# EAGLE board QwiicMicocontroller-Panel (EAGLE 9.0.0), part 1 of 13
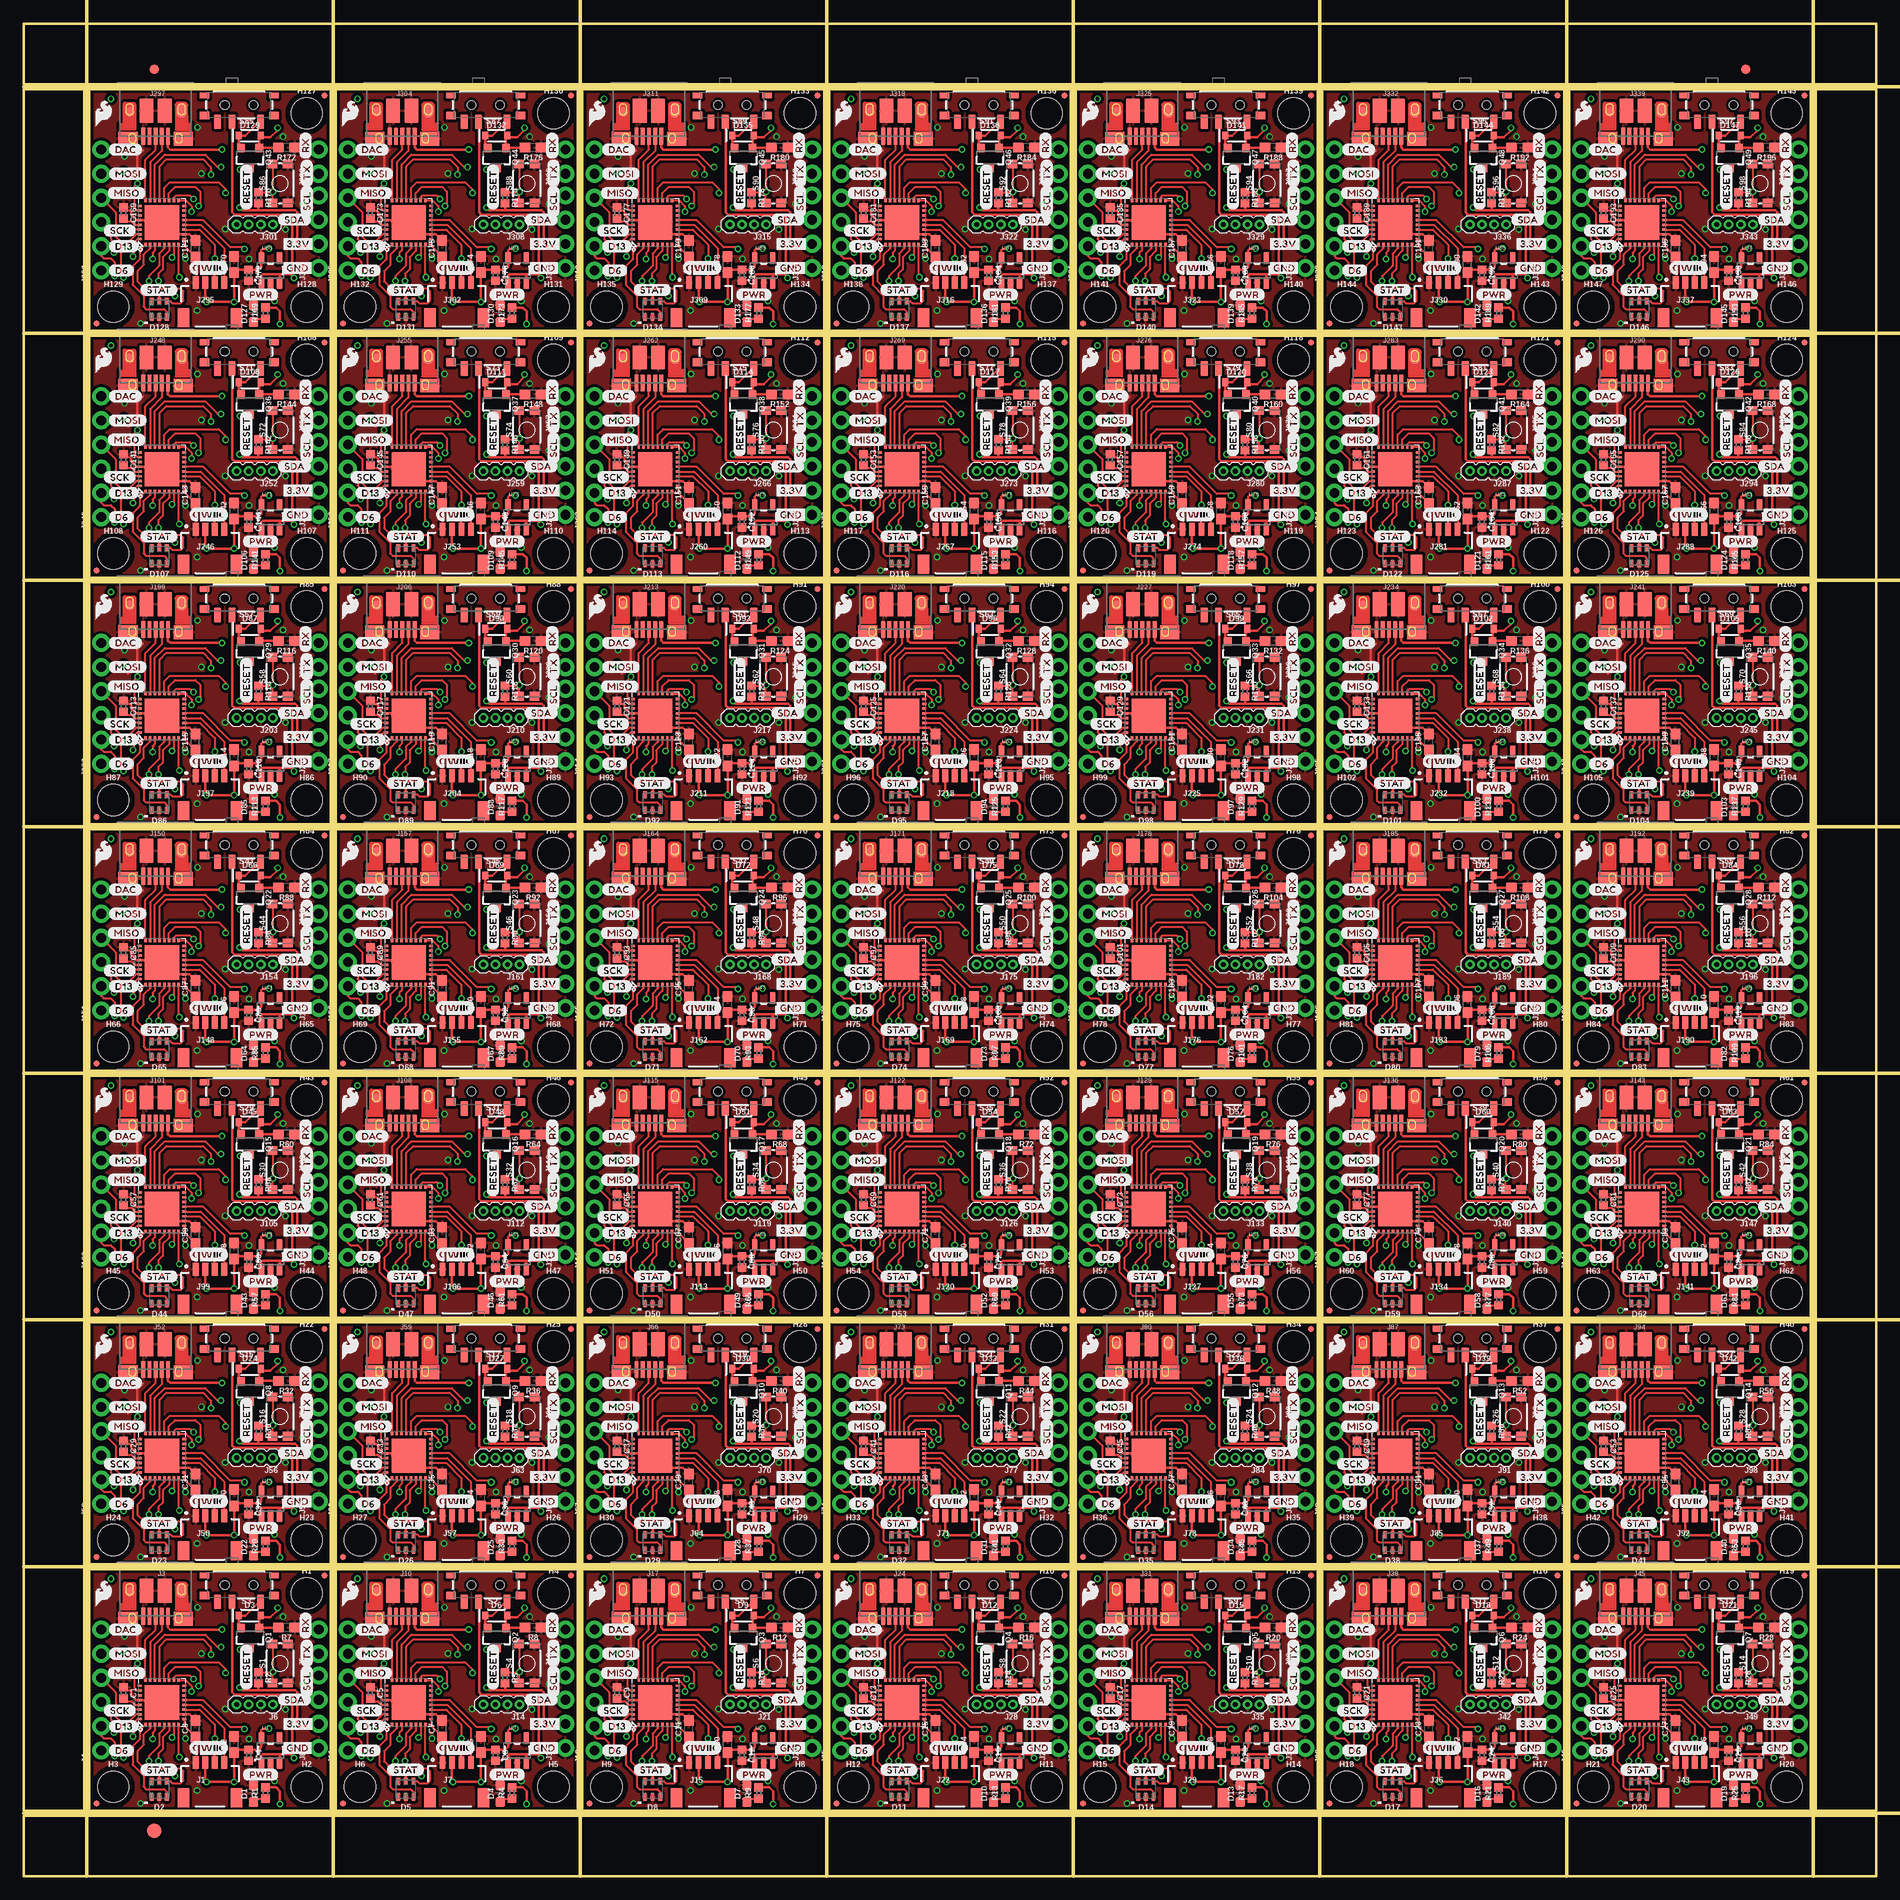
[diagram p0: board, top side]
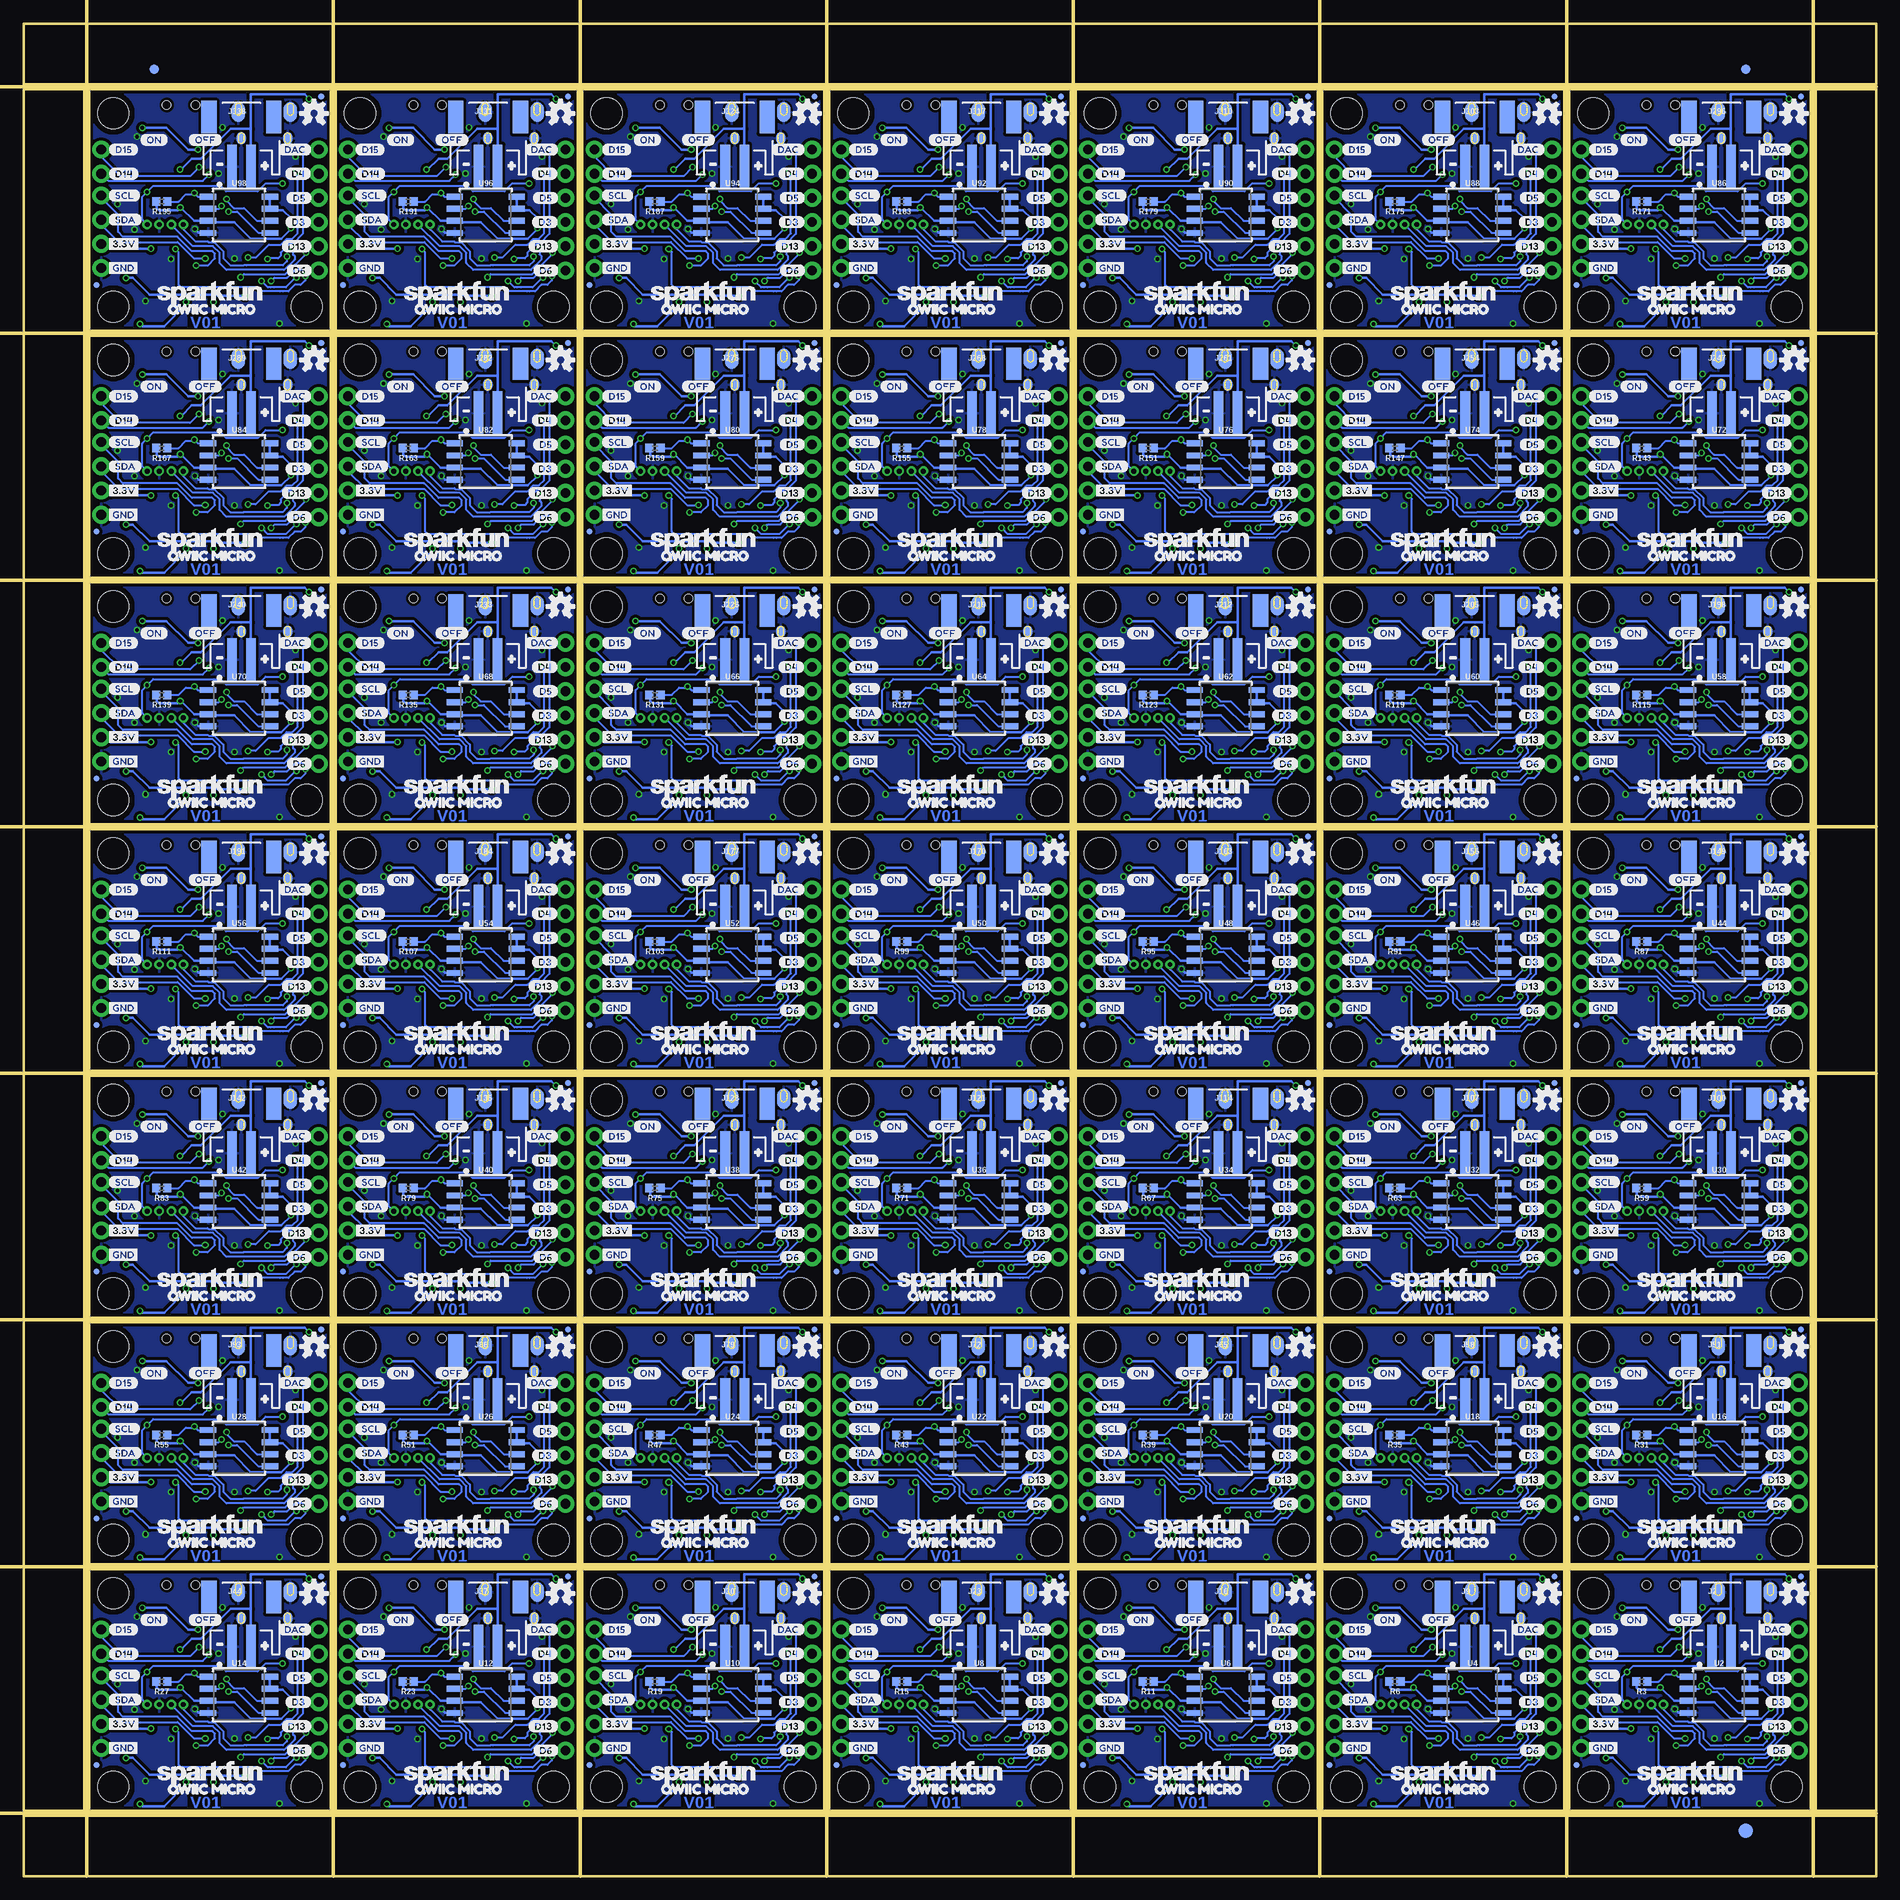
[diagram p1: board, bottom side, seen from below]

Size 194.56 x 194.56 mm. Coordinates in mm from the lower left corner, seen from the top.
Outline: 212 segments
Copper layers (1*16): Top 0.035mm / dielectric 1.5mm / Bottom 0.035mm
Design rules "SparkFun-2-layer-PCBWay-LIMIT": minimum track width 6mil, minimum drill 0.3mm, track to track 6mil, track to pad 6mil, pad to pad 6mil, via to via 6mil, smd to smd 6mil, copper to edge 6mil, drill to drill 6mil, minimum pad ring 6mil, minimum via ring 6mil, stop-mask expansion 4mil, vias tented up to drill 25mil, thermal gap 10mil
Milling: 16 lines

## Footprints (pad centres in the part's own frame; a part is rotated, then mirrored left to right if it is on the bottom)
0402 = smd 0.85 x 0.9: 1 -0.58,0; 2 0.58,0
0603 = smd 1.1 x 1: 1 -0.85,0; 2 0.85,0
LED-0603 = smd 1 x 1: A -0.877,0; C 0.877,0
APA102-2020 = smd 0.4 x 0.7: CKI -0.8,-0.85; CKO 0.8,-0.85; GND 0,0.85; SDI -0.8,0.85; SDO 0.8,0.85; VDD 0,-0.85
SOD-323 = smd 0.63 x 0.83: A 1.15,0; C -1.15,0
FIDUCIAL-1X2 = smd 1 x 1: 1 0,0
FIDUCIAL-1.5X3 = smd 1.5 x 1.5: 1 0,0
FIDUCIAL-MICRO = smd 0.635 x 0.635: 1 0,0
STAND-OFF = hole 3.302: 0,0
JST04_1MM_RA = smd 0.6 x 1.35: 1 -1.5,0; 2 -0.5,0; 3 0.5,0; 4 1.5,0 | smd 1.2 x 2: NC1 2.8,-3.675; NC2 -2.8,-3.675
JST-2-SMD = smd 1 x 4.6: 1 -1,-3.7; 2 1,-3.7 | smd 1.6 x 3.4: NC1 -3.4,1.5; NC2 3.4,1.5
USB-MICROB-PTH-MILL = smd 0.4 x 1.75: D+ 0,0; D- -0.65,0; GND 1.3,0; ID 0.65,0; VBUS -1.3,0 | smd 2 x 1.46: SHIELD -2.9,0.275; SHIELD2 2.9,0.275 | smd 1.425 x 2.5: SHIELD3 -0.963,-2.675; SHIELD4 0.963,-2.675 | smd 1.4 x 2.1 bottom: SHIELD5 -2.731,-2.531; SHIELD7 2.729,-2.531 | smd 1 x 1: SHIELD6 2.7,-2.575 | smd 1.1 x 1.5: SHIELD8 -2.731,-2.731 | smd 1 x 1.3 bottom: SHIELD9 -2.43,0.195; SHIELD10 2.43,0.195
1X06_NO_SILK = drill 1.016 pad 1.88: 1 0,0; 2 2.54,0; 3 5.08,0; 4 7.62,0; 5 10.16,0; 6 12.7,0
1X02_NO_SILK = drill 1.016 pad 1.88: 1 0,0; 2 2.54,0
1X04_1.27MM = drill 0.508 pad 1: 1 0,0; 2 1.27,0; 3 2.54,0; 4 3.81,0
1X04_NO_SILK = drill 1.016 pad 1.88: 1 0,0; 2 2.54,0; 3 5.08,0; 4 7.62,0
SOT23-3 = smd 0.8 x 0.9: 1 -0.95,-1; 2 0.95,-1; 3 0,1.1
TACTILE_SWITCH_SMD_4.6X2.8MM = smd 0.9 x 1: 1 -2.05,-0.8; 2 2.05,-0.8; 3 2.05,0.8; 4 -2.05,0.8
SWITCH_SPST_SMD_A = smd 0.7 x 1.5: 1 -2.25,-1.75; 2 -0.75,-1.75; 3 2.25,-1.75 | smd 1 x 0.6: GND1 -3.65,1; GND3 3.65,1 | smd 1 x 0.8: GND2 -3.65,-1.1; GND4 3.65,-1.1 | hole 0.9: -1.5,0; 1.5,0
QFN32 = smd 0.25 x 0.4: GND 2.75,4.85; GNDANA 1.25,0.15; NRESET 3.75,4.85; PA08 1.75,0.15; PA09 2.25,0.15; PA10 2.75,0.15; PA11 3.25,0.15; PA14 3.75,0.15; PA15 4.25,0.15; PA27 4.25,4.85; PA28 3.25,4.85; PA30 1.25,4.85; PA31 0.75,4.85; VDDANA 0.75,0.15; VDDCORE 2.25,4.85; VDDIN 1.75,4.85 | smd 0.4 x 0.25: PA00 0.15,4.25; PA01 0.15,3.75; PA02 0.15,3.25; PA03 0.15,2.75; PA04 0.15,2.25; PA05 0.15,1.75; PA06 0.15,1.25; PA07 0.15,0.75; PA16 4.85,0.75; PA17 4.85,1.25; PA18 4.85,1.75; PA19 4.85,2.25; PA22 4.85,2.75; PA23 4.85,3.25; PA24 4.85,3.75; PA25 4.85,4.25 | smd 3.6 x 3.6: PAD 2.5,2.5
TP_15TH = drill 0.381 pad 0.61: P$1 0,0
SOT23-5 = smd 0.55 x 1.2: 1 -0.95,-1.3; 2 0,-1.3; 3 0.95,-1.3; 4 0.95,1.3; 5 -0.95,1.3
SOIC-8 = smd 0.61 x 1.702: 1 -1.905,-3.251; 2 -0.635,-3.251; 3 0.635,-3.251; 4 1.905,-3.251; 5 1.905,3.251; 6 0.635,3.251; 7 -0.635,3.251; 8 -1.905,3.251

## Placement (x,y rotation side)
C1  1.0uF  [0402]  10.49,19.25 270 top
C2  10uF  [0603]  22.1,13.84 90 top
C3  10uF  [0603]  18.03,15.49 90 top
C4  1.0uF  [0402]  23.62,12.7 270 top
C5  1.0uF  [0402]  36.39,19.25 270 top
C6  10uF  [0603]  48.01,13.84 90 top
C7  10uF  [0603]  43.94,15.49 90 top
C8  1.0uF  [0402]  49.53,12.7 270 top
C9  1.0uF  [0402]  62.3,19.25 270 top
C10  10uF  [0603]  73.91,13.84 90 top
C11  10uF  [0603]  69.85,15.49 90 top
C12  1.0uF  [0402]  75.44,12.7 270 top
C13  1.0uF  [0402]  88.21,19.25 270 top
C14  10uF  [0603]  99.82,13.84 90 top
C15  10uF  [0603]  95.76,15.49 90 top
C16  1.0uF  [0402]  101.35,12.7 270 top
C17  1.0uF  [0402]  114.12,19.25 270 top
C18  10uF  [0603]  125.73,13.84 90 top
C19  10uF  [0603]  121.67,15.49 90 top
C20  1.0uF  [0402]  127.25,12.7 270 top
C21  1.0uF  [0402]  140.03,19.25 270 top
C22  10uF  [0603]  151.64,13.84 90 top
C23  10uF  [0603]  147.57,15.49 90 top
C24  1.0uF  [0402]  153.16,12.7 270 top
C25  1.0uF  [0402]  165.93,19.25 270 top
C26  10uF  [0603]  177.55,13.84 90 top
C27  10uF  [0603]  173.48,15.49 90 top
C28  1.0uF  [0402]  179.07,12.7 270 top
C29  1.0uF  [0402]  10.49,45.15 270 top
C30  10uF  [0603]  22.1,39.75 90 top
C31  10uF  [0603]  18.03,41.4 90 top
C32  1.0uF  [0402]  23.62,38.61 270 top
C33  1.0uF  [0402]  36.39,45.15 270 top
C34  10uF  [0603]  48.01,39.75 90 top
C35  10uF  [0603]  43.94,41.4 90 top
C36  1.0uF  [0402]  49.53,38.61 270 top
C37  1.0uF  [0402]  62.3,45.15 270 top
C38  10uF  [0603]  73.91,39.75 90 top
C39  10uF  [0603]  69.85,41.4 90 top
C40  1.0uF  [0402]  75.44,38.61 270 top
C41  1.0uF  [0402]  88.21,45.15 270 top
C42  10uF  [0603]  99.82,39.75 90 top
C43  10uF  [0603]  95.76,41.4 90 top
C44  1.0uF  [0402]  101.35,38.61 270 top
C45  1.0uF  [0402]  114.12,45.15 270 top
C46  10uF  [0603]  125.73,39.75 90 top
C47  10uF  [0603]  121.67,41.4 90 top
C48  1.0uF  [0402]  127.25,38.61 270 top
C49  1.0uF  [0402]  140.03,45.15 270 top
C50  10uF  [0603]  151.64,39.75 90 top
C51  10uF  [0603]  147.57,41.4 90 top
C52  1.0uF  [0402]  153.16,38.61 270 top
C53  1.0uF  [0402]  165.93,45.15 270 top
C54  10uF  [0603]  177.55,39.75 90 top
C55  10uF  [0603]  173.48,41.4 90 top
C56  1.0uF  [0402]  179.07,38.61 270 top
C57  1.0uF  [0402]  10.49,71.06 270 top
C58  10uF  [0603]  22.1,65.66 90 top
C59  10uF  [0603]  18.03,67.31 90 top
C60  1.0uF  [0402]  23.62,64.52 270 top
C61  1.0uF  [0402]  36.39,71.06 270 top
C62  10uF  [0603]  48.01,65.66 90 top
C63  10uF  [0603]  43.94,67.31 90 top
C64  1.0uF  [0402]  49.53,64.52 270 top
C65  1.0uF  [0402]  62.3,71.06 270 top
C66  10uF  [0603]  73.91,65.66 90 top
C67  10uF  [0603]  69.85,67.31 90 top
C68  1.0uF  [0402]  75.44,64.52 270 top
C69  1.0uF  [0402]  88.21,71.06 270 top
C70  10uF  [0603]  99.82,65.66 90 top
C71  10uF  [0603]  95.76,67.31 90 top
C72  1.0uF  [0402]  101.35,64.52 270 top
C73  1.0uF  [0402]  114.12,71.06 270 top
C74  10uF  [0603]  125.73,65.66 90 top
C75  10uF  [0603]  121.67,67.31 90 top
C76  1.0uF  [0402]  127.25,64.52 270 top
C77  1.0uF  [0402]  140.03,71.06 270 top
C78  10uF  [0603]  151.64,65.66 90 top
C79  10uF  [0603]  147.57,67.31 90 top
C80  1.0uF  [0402]  153.16,64.52 270 top
C81  1.0uF  [0402]  165.93,71.06 270 top
C82  10uF  [0603]  177.55,65.66 90 top
C83  10uF  [0603]  173.48,67.31 90 top
C84  1.0uF  [0402]  179.07,64.52 270 top
C85  1.0uF  [0402]  10.49,96.97 270 top
C86  10uF  [0603]  22.1,91.57 90 top
C87  10uF  [0603]  18.03,93.22 90 top
C88  1.0uF  [0402]  23.62,90.42 270 top
C89  1.0uF  [0402]  36.39,96.97 270 top
C90  10uF  [0603]  48.01,91.57 90 top
C91  10uF  [0603]  43.94,93.22 90 top
C92  1.0uF  [0402]  49.53,90.42 270 top
C93  1.0uF  [0402]  62.3,96.97 270 top
C94  10uF  [0603]  73.91,91.57 90 top
C95  10uF  [0603]  69.85,93.22 90 top
C96  1.0uF  [0402]  75.44,90.42 270 top
C97  1.0uF  [0402]  88.21,96.97 270 top
C98  10uF  [0603]  99.82,91.57 90 top
C99  10uF  [0603]  95.76,93.22 90 top
C100  1.0uF  [0402]  101.35,90.42 270 top
C101  1.0uF  [0402]  114.12,96.97 270 top
C102  10uF  [0603]  125.73,91.57 90 top
C103  10uF  [0603]  121.67,93.22 90 top
C104  1.0uF  [0402]  127.25,90.42 270 top
C105  1.0uF  [0402]  140.03,96.97 270 top
C106  10uF  [0603]  151.64,91.57 90 top
C107  10uF  [0603]  147.57,93.22 90 top
C108  1.0uF  [0402]  153.16,90.42 270 top
C109  1.0uF  [0402]  165.93,96.97 270 top
C110  10uF  [0603]  177.55,91.57 90 top
C111  10uF  [0603]  173.48,93.22 90 top
C112  1.0uF  [0402]  179.07,90.42 270 top
C113  1.0uF  [0402]  10.49,122.88 270 top
C114  10uF  [0603]  22.1,117.48 90 top
C115  10uF  [0603]  18.03,119.13 90 top
C116  1.0uF  [0402]  23.62,116.33 270 top
C117  1.0uF  [0402]  36.39,122.88 270 top
C118  10uF  [0603]  48.01,117.48 90 top
C119  10uF  [0603]  43.94,119.13 90 top
C120  1.0uF  [0402]  49.53,116.33 270 top
C121  1.0uF  [0402]  62.3,122.88 270 top
C122  10uF  [0603]  73.91,117.48 90 top
C123  10uF  [0603]  69.85,119.13 90 top
C124  1.0uF  [0402]  75.44,116.33 270 top
C125  1.0uF  [0402]  88.21,122.88 270 top
C126  10uF  [0603]  99.82,117.48 90 top
C127  10uF  [0603]  95.76,119.13 90 top
C128  1.0uF  [0402]  101.35,116.33 270 top
C129  1.0uF  [0402]  114.12,122.88 270 top
C130  10uF  [0603]  125.73,117.48 90 top
C131  10uF  [0603]  121.67,119.13 90 top
C132  1.0uF  [0402]  127.25,116.33 270 top
C133  1.0uF  [0402]  140.03,122.88 270 top
C134  10uF  [0603]  151.64,117.48 90 top
C135  10uF  [0603]  147.57,119.13 90 top
C136  1.0uF  [0402]  153.16,116.33 270 top
C137  1.0uF  [0402]  165.93,122.88 270 top
C138  10uF  [0603]  177.55,117.48 90 top
C139  10uF  [0603]  173.48,119.13 90 top
C140  1.0uF  [0402]  179.07,116.33 270 top
C141  1.0uF  [0402]  10.49,148.79 270 top
C142  10uF  [0603]  22.1,143.38 90 top
C143  10uF  [0603]  18.03,145.03 90 top
C144  1.0uF  [0402]  23.62,142.24 270 top
C145  1.0uF  [0402]  36.39,148.79 270 top
C146  10uF  [0603]  48.01,143.38 90 top
C147  10uF  [0603]  43.94,145.03 90 top
C148  1.0uF  [0402]  49.53,142.24 270 top
C149  1.0uF  [0402]  62.3,148.79 270 top
C150  10uF  [0603]  73.91,143.38 90 top
C151  10uF  [0603]  69.85,145.03 90 top
C152  1.0uF  [0402]  75.44,142.24 270 top
C153  1.0uF  [0402]  88.21,148.79 270 top
C154  10uF  [0603]  99.82,143.38 90 top
C155  10uF  [0603]  95.76,145.03 90 top
C156  1.0uF  [0402]  101.35,142.24 270 top
C157  1.0uF  [0402]  114.12,148.79 270 top
C158  10uF  [0603]  125.73,143.38 90 top
C159  10uF  [0603]  121.67,145.03 90 top
C160  1.0uF  [0402]  127.25,142.24 270 top
C161  1.0uF  [0402]  140.03,148.79 270 top
C162  10uF  [0603]  151.64,143.38 90 top
C163  10uF  [0603]  147.57,145.03 90 top
C164  1.0uF  [0402]  153.16,142.24 270 top
C165  1.0uF  [0402]  165.93,148.79 270 top
C166  10uF  [0603]  177.55,143.38 90 top
C167  10uF  [0603]  173.48,145.03 90 top
C168  1.0uF  [0402]  179.07,142.24 270 top
C169  1.0uF  [0402]  10.49,174.69 270 top
C170  10uF  [0603]  22.1,169.29 90 top
C171  10uF  [0603]  18.03,170.94 90 top
C172  1.0uF  [0402]  23.62,168.15 270 top
C173  1.0uF  [0402]  36.39,174.69 270 top
C174  10uF  [0603]  48.01,169.29 90 top
C175  10uF  [0603]  43.94,170.94 90 top
C176  1.0uF  [0402]  49.53,168.15 270 top
C177  1.0uF  [0402]  62.3,174.69 270 top
C178  10uF  [0603]  73.91,169.29 90 top
C179  10uF  [0603]  69.85,170.94 90 top
C180  1.0uF  [0402]  75.44,168.15 270 top
C181  1.0uF  [0402]  88.21,174.69 270 top
C182  10uF  [0603]  99.82,169.29 90 top
C183  10uF  [0603]  95.76,170.94 90 top
C184  1.0uF  [0402]  101.35,168.15 270 top
C185  1.0uF  [0402]  114.12,174.69 270 top
C186  10uF  [0603]  125.73,169.29 90 top
C187  10uF  [0603]  121.67,170.94 90 top
C188  1.0uF  [0402]  127.25,168.15 270 top
C189  1.0uF  [0402]  140.03,174.69 270 top
C190  10uF  [0603]  151.64,169.29 90 top
C191  10uF  [0603]  147.57,170.94 90 top
C192  1.0uF  [0402]  153.16,168.15 270 top
C193  1.0uF  [0402]  165.93,174.69 270 top
C194  10uF  [0603]  177.55,169.29 90 top
C195  10uF  [0603]  173.48,170.94 90 top
C196  1.0uF  [0402]  179.07,168.15 270 top
D1  RED  [LED-0603]  24.13,8.66 90 top
D2  APA102-2020  [APA102-2020]  14.22,9.14 180 top
D3  1A/23V/620mV  [SOD-323]  23.72,27.38 0 top
D4  RED  [LED-0603]  50.04,8.66 90 top
D5  APA102-2020  [APA102-2020]  40.13,9.14 180 top
D6  1A/23V/620mV  [SOD-323]  49.63,27.38 0 top
D7  RED  [LED-0603]  75.95,8.66 90 top
D8  APA102-2020  [APA102-2020]  66.04,9.14 180 top
D9  1A/23V/620mV  [SOD-323]  75.54,27.38 0 top
D10  RED  [LED-0603]  101.85,8.66 90 top
D11  APA102-2020  [APA102-2020]  91.95,9.14 180 top
D12  1A/23V/620mV  [SOD-323]  101.45,27.38 0 top
D13  RED  [LED-0603]  127.76,8.66 90 top
D14  APA102-2020  [APA102-2020]  117.86,9.14 180 top
D15  1A/23V/620mV  [SOD-323]  127.36,27.38 0 top
D16  RED  [LED-0603]  153.67,8.66 90 top
D17  APA102-2020  [APA102-2020]  143.76,9.14 180 top
D18  1A/23V/620mV  [SOD-323]  153.26,27.38 0 top
D19  RED  [LED-0603]  179.58,8.66 90 top
D20  APA102-2020  [APA102-2020]  169.67,9.14 180 top
D21  1A/23V/620mV  [SOD-323]  179.17,27.38 0 top
D22  RED  [LED-0603]  24.13,34.57 90 top
D23  APA102-2020  [APA102-2020]  14.22,35.05 180 top
D24  1A/23V/620mV  [SOD-323]  23.72,53.29 0 top
D25  RED  [LED-0603]  50.04,34.57 90 top
D26  APA102-2020  [APA102-2020]  40.13,35.05 180 top
D27  1A/23V/620mV  [SOD-323]  49.63,53.29 0 top
D28  RED  [LED-0603]  75.95,34.57 90 top
D29  APA102-2020  [APA102-2020]  66.04,35.05 180 top
D30  1A/23V/620mV  [SOD-323]  75.54,53.29 0 top
D31  RED  [LED-0603]  101.85,34.57 90 top
D32  APA102-2020  [APA102-2020]  91.95,35.05 180 top
D33  1A/23V/620mV  [SOD-323]  101.45,53.29 0 top
D34  RED  [LED-0603]  127.76,34.57 90 top
D35  APA102-2020  [APA102-2020]  117.86,35.05 180 top
D36  1A/23V/620mV  [SOD-323]  127.36,53.29 0 top
D37  RED  [LED-0603]  153.67,34.57 90 top
D38  APA102-2020  [APA102-2020]  143.76,35.05 180 top
D39  1A/23V/620mV  [SOD-323]  153.26,53.29 0 top
D40  RED  [LED-0603]  179.58,34.57 90 top
D41  APA102-2020  [APA102-2020]  169.67,35.05 180 top
D42  1A/23V/620mV  [SOD-323]  179.17,53.29 0 top
D43  RED  [LED-0603]  24.13,60.48 90 top
D44  APA102-2020  [APA102-2020]  14.22,60.96 180 top
D45  1A/23V/620mV  [SOD-323]  23.72,79.2 0 top
D46  RED  [LED-0603]  50.04,60.48 90 top
D47  APA102-2020  [APA102-2020]  40.13,60.96 180 top
D48  1A/23V/620mV  [SOD-323]  49.63,79.2 0 top
D49  RED  [LED-0603]  75.95,60.48 90 top
D50  APA102-2020  [APA102-2020]  66.04,60.96 180 top
D51  1A/23V/620mV  [SOD-323]  75.54,79.2 0 top
D52  RED  [LED-0603]  101.85,60.48 90 top
D53  APA102-2020  [APA102-2020]  91.95,60.96 180 top
D54  1A/23V/620mV  [SOD-323]  101.45,79.2 0 top
D55  RED  [LED-0603]  127.76,60.48 90 top
D56  APA102-2020  [APA102-2020]  117.86,60.96 180 top
D57  1A/23V/620mV  [SOD-323]  127.36,79.2 0 top
D58  RED  [LED-0603]  153.67,60.48 90 top
D59  APA102-2020  [APA102-2020]  143.76,60.96 180 top
D60  1A/23V/620mV  [SOD-323]  153.26,79.2 0 top
D61  RED  [LED-0603]  179.58,60.48 90 top
D62  APA102-2020  [APA102-2020]  169.67,60.96 180 top
D63  1A/23V/620mV  [SOD-323]  179.17,79.2 0 top
D64  RED  [LED-0603]  24.13,86.39 90 top
D65  APA102-2020  [APA102-2020]  14.22,86.87 180 top
D66  1A/23V/620mV  [SOD-323]  23.72,105.11 0 top
D67  RED  [LED-0603]  50.04,86.39 90 top
D68  APA102-2020  [APA102-2020]  40.13,86.87 180 top
D69  1A/23V/620mV  [SOD-323]  49.63,105.11 0 top
D70  RED  [LED-0603]  75.95,86.39 90 top
D71  APA102-2020  [APA102-2020]  66.04,86.87 180 top
D72  1A/23V/620mV  [SOD-323]  75.54,105.11 0 top
D73  RED  [LED-0603]  101.85,86.39 90 top
D74  APA102-2020  [APA102-2020]  91.95,86.87 180 top
D75  1A/23V/620mV  [SOD-323]  101.45,105.11 0 top
D76  RED  [LED-0603]  127.76,86.39 90 top
D77  APA102-2020  [APA102-2020]  117.86,86.87 180 top
D78  1A/23V/620mV  [SOD-323]  127.36,105.11 0 top
D79  RED  [LED-0603]  153.67,86.39 90 top
D80  APA102-2020  [APA102-2020]  143.76,86.87 180 top
D81  1A/23V/620mV  [SOD-323]  153.26,105.11 0 top
D82  RED  [LED-0603]  179.58,86.39 90 top
D83  APA102-2020  [APA102-2020]  169.67,86.87 180 top
D84  1A/23V/620mV  [SOD-323]  179.17,105.11 0 top
D85  RED  [LED-0603]  24.13,112.29 90 top
D86  APA102-2020  [APA102-2020]  14.22,112.78 180 top
D87  1A/23V/620mV  [SOD-323]  23.72,131.01 0 top
D88  RED  [LED-0603]  50.04,112.29 90 top
D89  APA102-2020  [APA102-2020]  40.13,112.78 180 top
D90  1A/23V/620mV  [SOD-323]  49.63,131.01 0 top
D91  RED  [LED-0603]  75.95,112.29 90 top
D92  APA102-2020  [APA102-2020]  66.04,112.78 180 top
D93  1A/23V/620mV  [SOD-323]  75.54,131.01 0 top
D94  RED  [LED-0603]  101.85,112.29 90 top
D95  APA102-2020  [APA102-2020]  91.95,112.78 180 top
D96  1A/23V/620mV  [SOD-323]  101.45,131.01 0 top
D97  RED  [LED-0603]  127.76,112.29 90 top
D98  APA102-2020  [APA102-2020]  117.86,112.78 180 top
D99  1A/23V/620mV  [SOD-323]  127.36,131.01 0 top
D100  RED  [LED-0603]  153.67,112.29 90 top
D101  APA102-2020  [APA102-2020]  143.76,112.78 180 top
D102  1A/23V/620mV  [SOD-323]  153.26,131.01 0 top
D103  RED  [LED-0603]  179.58,112.29 90 top
D104  APA102-2020  [APA102-2020]  169.67,112.78 180 top
D105  1A/23V/620mV  [SOD-323]  179.17,131.01 0 top
D106  RED  [LED-0603]  24.13,138.2 90 top
D107  APA102-2020  [APA102-2020]  14.22,138.68 180 top
D108  1A/23V/620mV  [SOD-323]  23.72,156.92 0 top
D109  RED  [LED-0603]  50.04,138.2 90 top
D110  APA102-2020  [APA102-2020]  40.13,138.68 180 top
D111  1A/23V/620mV  [SOD-323]  49.63,156.92 0 top
D112  RED  [LED-0603]  75.95,138.2 90 top
D113  APA102-2020  [APA102-2020]  66.04,138.68 180 top
D114  1A/23V/620mV  [SOD-323]  75.54,156.92 0 top
D115  RED  [LED-0603]  101.85,138.2 90 top
D116  APA102-2020  [APA102-2020]  91.95,138.68 180 top
D117  1A/23V/620mV  [SOD-323]  101.45,156.92 0 top
D118  RED  [LED-0603]  127.76,138.2 90 top
D119  APA102-2020  [APA102-2020]  117.86,138.68 180 top
D120  1A/23V/620mV  [SOD-323]  127.36,156.92 0 top
D121  RED  [LED-0603]  153.67,138.2 90 top
D122  APA102-2020  [APA102-2020]  143.76,138.68 180 top
D123  1A/23V/620mV  [SOD-323]  153.26,156.92 0 top
D124  RED  [LED-0603]  179.58,138.2 90 top
D125  APA102-2020  [APA102-2020]  169.67,138.68 180 top
D126  1A/23V/620mV  [SOD-323]  179.17,156.92 0 top
D127  RED  [LED-0603]  24.13,164.11 90 top
D128  APA102-2020  [APA102-2020]  14.22,164.59 180 top
D129  1A/23V/620mV  [SOD-323]  23.72,182.83 0 top
D130  RED  [LED-0603]  50.04,164.11 90 top
D131  APA102-2020  [APA102-2020]  40.13,164.59 180 top
D132  1A/23V/620mV  [SOD-323]  49.63,182.83 0 top
D133  RED  [LED-0603]  75.95,164.11 90 top
D134  APA102-2020  [APA102-2020]  66.04,164.59 180 top
D135  1A/23V/620mV  [SOD-323]  75.54,182.83 0 top
D136  RED  [LED-0603]  101.85,164.11 90 top
D137  APA102-2020  [APA102-2020]  91.95,164.59 180 top
D138  1A/23V/620mV  [SOD-323]  101.45,182.83 0 top
D139  RED  [LED-0603]  127.76,164.11 90 top
D140  APA102-2020  [APA102-2020]  117.86,164.59 180 top
D141  1A/23V/620mV  [SOD-323]  127.36,182.83 0 top
D142  RED  [LED-0603]  153.67,164.11 90 top
D143  APA102-2020  [APA102-2020]  143.76,164.59 180 top
D144  1A/23V/620mV  [SOD-323]  153.26,182.83 0 top
D145  RED  [LED-0603]  179.58,164.11 90 top
D146  APA102-2020  [APA102-2020]  169.67,164.59 180 top
D147  1A/23V/620mV  [SOD-323]  179.17,182.83 0 top
E$1  [FIDUCIAL-1X2]  13.72,189.8 0 top
E$2  [FIDUCIAL-1X2]  13.72,189.8 0 bottom
E$3  [FIDUCIAL-1X2]  180.85,189.8 0 top
E$4  [FIDUCIAL-1X2]  180.85,189.8 0 bottom
E$5  [FIDUCIAL-1.5X3]  13.72,4.76 0 top
E$6  [FIDUCIAL-1.5X3]  13.72,4.76 0 bottom
FD1  FIDUCIALUFIDUCIAL  [FIDUCIAL-MICRO]  7.62,7.62 0 top
FD2  FIDUCIALUFIDUCIAL  [FIDUCIAL-MICRO]  31.5,11.68 0 bottom
FD3  FIDUCIALUFIDUCIAL  [FIDUCIAL-MICRO]  7.87,31.5 0 bottom
FD4  FIDUCIALUFIDUCIAL  [FIDUCIAL-MICRO]  31.57,31.57 0 top
FD5  FIDUCIALUFIDUCIAL  [FIDUCIAL-MICRO]  33.53,7.62 0 top
FD6  FIDUCIALUFIDUCIAL  [FIDUCIAL-MICRO]  57.4,11.68 0 bottom
FD7  FIDUCIALUFIDUCIAL  [FIDUCIAL-MICRO]  33.78,31.5 0 bottom
FD8  FIDUCIALUFIDUCIAL  [FIDUCIAL-MICRO]  57.48,31.57 0 top
FD9  FIDUCIALUFIDUCIAL  [FIDUCIAL-MICRO]  59.44,7.62 0 top
FD10  FIDUCIALUFIDUCIAL  [FIDUCIAL-MICRO]  83.31,11.68 0 bottom
FD11  FIDUCIALUFIDUCIAL  [FIDUCIAL-MICRO]  59.69,31.5 0 bottom
FD12  FIDUCIALUFIDUCIAL  [FIDUCIAL-MICRO]  83.39,31.57 0 top
FD13  FIDUCIALUFIDUCIAL  [FIDUCIAL-MICRO]  85.34,7.62 0 top
FD14  FIDUCIALUFIDUCIAL  [FIDUCIAL-MICRO]  109.22,11.68 0 bottom
FD15  FIDUCIALUFIDUCIAL  [FIDUCIAL-MICRO]  85.6,31.5 0 bottom
FD16  FIDUCIALUFIDUCIAL  [FIDUCIAL-MICRO]  109.3,31.57 0 top
FD17  FIDUCIALUFIDUCIAL  [FIDUCIAL-MICRO]  111.25,7.62 0 top
FD18  FIDUCIALUFIDUCIAL  [FIDUCIAL-MICRO]  135.13,11.68 0 bottom
FD19  FIDUCIALUFIDUCIAL  [FIDUCIAL-MICRO]  111.51,31.5 0 bottom
FD20  FIDUCIALUFIDUCIAL  [FIDUCIAL-MICRO]  135.2,31.57 0 top
FD21  FIDUCIALUFIDUCIAL  [FIDUCIAL-MICRO]  137.16,7.62 0 top
FD22  FIDUCIALUFIDUCIAL  [FIDUCIAL-MICRO]  161.04,11.68 0 bottom
FD23  FIDUCIALUFIDUCIAL  [FIDUCIAL-MICRO]  137.41,31.5 0 bottom
FD24  FIDUCIALUFIDUCIAL  [FIDUCIAL-MICRO]  161.11,31.57 0 top
FD25  FIDUCIALUFIDUCIAL  [FIDUCIAL-MICRO]  163.07,7.62 0 top
FD26  FIDUCIALUFIDUCIAL  [FIDUCIAL-MICRO]  186.94,11.68 0 bottom
FD27  FIDUCIALUFIDUCIAL  [FIDUCIAL-MICRO]  163.32,31.5 0 bottom
FD28  FIDUCIALUFIDUCIAL  [FIDUCIAL-MICRO]  187.02,31.57 0 top
FD29  FIDUCIALUFIDUCIAL  [FIDUCIAL-MICRO]  7.62,33.53 0 top
FD30  FIDUCIALUFIDUCIAL  [FIDUCIAL-MICRO]  31.5,37.59 0 bottom
FD31  FIDUCIALUFIDUCIAL  [FIDUCIAL-MICRO]  7.87,57.4 0 bottom
FD32  FIDUCIALUFIDUCIAL  [FIDUCIAL-MICRO]  31.57,57.48 0 top
FD33  FIDUCIALUFIDUCIAL  [FIDUCIAL-MICRO]  33.53,33.53 0 top
FD34  FIDUCIALUFIDUCIAL  [FIDUCIAL-MICRO]  57.4,37.59 0 bottom
FD35  FIDUCIALUFIDUCIAL  [FIDUCIAL-MICRO]  33.78,57.4 0 bottom
FD36  FIDUCIALUFIDUCIAL  [FIDUCIAL-MICRO]  57.48,57.48 0 top
FD37  FIDUCIALUFIDUCIAL  [FIDUCIAL-MICRO]  59.44,33.53 0 top
FD38  FIDUCIALUFIDUCIAL  [FIDUCIAL-MICRO]  83.31,37.59 0 bottom
FD39  FIDUCIALUFIDUCIAL  [FIDUCIAL-MICRO]  59.69,57.4 0 bottom
FD40  FIDUCIALUFIDUCIAL  [FIDUCIAL-MICRO]  83.39,57.48 0 top
FD41  FIDUCIALUFIDUCIAL  [FIDUCIAL-MICRO]  85.34,33.53 0 top
FD42  FIDUCIALUFIDUCIAL  [FIDUCIAL-MICRO]  109.22,37.59 0 bottom
FD43  FIDUCIALUFIDUCIAL  [FIDUCIAL-MICRO]  85.6,57.4 0 bottom
FD44  FIDUCIALUFIDUCIAL  [FIDUCIAL-MICRO]  109.3,57.48 0 top
FD45  FIDUCIALUFIDUCIAL  [FIDUCIAL-MICRO]  111.25,33.53 0 top
FD46  FIDUCIALUFIDUCIAL  [FIDUCIAL-MICRO]  135.13,37.59 0 bottom
FD47  FIDUCIALUFIDUCIAL  [FIDUCIAL-MICRO]  111.51,57.4 0 bottom
FD48  FIDUCIALUFIDUCIAL  [FIDUCIAL-MICRO]  135.2,57.48 0 top
FD49  FIDUCIALUFIDUCIAL  [FIDUCIAL-MICRO]  137.16,33.53 0 top
FD50  FIDUCIALUFIDUCIAL  [FIDUCIAL-MICRO]  161.04,37.59 0 bottom
FD51  FIDUCIALUFIDUCIAL  [FIDUCIAL-MICRO]  137.41,57.4 0 bottom
FD52  FIDUCIALUFIDUCIAL  [FIDUCIAL-MICRO]  161.11,57.48 0 top
FD53  FIDUCIALUFIDUCIAL  [FIDUCIAL-MICRO]  163.07,33.53 0 top
FD54  FIDUCIALUFIDUCIAL  [FIDUCIAL-MICRO]  186.94,37.59 0 bottom
FD55  FIDUCIALUFIDUCIAL  [FIDUCIAL-MICRO]  163.32,57.4 0 bottom
FD56  FIDUCIALUFIDUCIAL  [FIDUCIAL-MICRO]  187.02,57.48 0 top
FD57  FIDUCIALUFIDUCIAL  [FIDUCIAL-MICRO]  7.62,59.44 0 top
FD58  FIDUCIALUFIDUCIAL  [FIDUCIAL-MICRO]  31.5,63.5 0 bottom
FD59  FIDUCIALUFIDUCIAL  [FIDUCIAL-MICRO]  7.87,83.31 0 bottom
FD60  FIDUCIALUFIDUCIAL  [FIDUCIAL-MICRO]  31.57,83.39 0 top
FD61  FIDUCIALUFIDUCIAL  [FIDUCIAL-MICRO]  33.53,59.44 0 top
FD62  FIDUCIALUFIDUCIAL  [FIDUCIAL-MICRO]  57.4,63.5 0 bottom
FD63  FIDUCIALUFIDUCIAL  [FIDUCIAL-MICRO]  33.78,83.31 0 bottom
FD64  FIDUCIALUFIDUCIAL  [FIDUCIAL-MICRO]  57.48,83.39 0 top
FD65  FIDUCIALUFIDUCIAL  [FIDUCIAL-MICRO]  59.44,59.44 0 top
FD66  FIDUCIALUFIDUCIAL  [FIDUCIAL-MICRO]  83.31,63.5 0 bottom
FD67  FIDUCIALUFIDUCIAL  [FIDUCIAL-MICRO]  59.69,83.31 0 bottom
FD68  FIDUCIALUFIDUCIAL  [FIDUCIAL-MICRO]  83.39,83.39 0 top
FD69  FIDUCIALUFIDUCIAL  [FIDUCIAL-MICRO]  85.34,59.44 0 top
FD70  FIDUCIALUFIDUCIAL  [FIDUCIAL-MICRO]  109.22,63.5 0 bottom
FD71  FIDUCIALUFIDUCIAL  [FIDUCIAL-MICRO]  85.6,83.31 0 bottom
FD72  FIDUCIALUFIDUCIAL  [FIDUCIAL-MICRO]  109.3,83.39 0 top
FD73  FIDUCIALUFIDUCIAL  [FIDUCIAL-MICRO]  111.25,59.44 0 top
FD74  FIDUCIALUFIDUCIAL  [FIDUCIAL-MICRO]  135.13,63.5 0 bottom
FD75  FIDUCIALUFIDUCIAL  [FIDUCIAL-MICRO]  111.51,83.31 0 bottom
FD76  FIDUCIALUFIDUCIAL  [FIDUCIAL-MICRO]  135.2,83.39 0 top
FD77  FIDUCIALUFIDUCIAL  [FIDUCIAL-MICRO]  137.16,59.44 0 top
FD78  FIDUCIALUFIDUCIAL  [FIDUCIAL-MICRO]  161.04,63.5 0 bottom
FD79  FIDUCIALUFIDUCIAL  [FIDUCIAL-MICRO]  137.41,83.31 0 bottom
FD80  FIDUCIALUFIDUCIAL  [FIDUCIAL-MICRO]  161.11,83.39 0 top
FD81  FIDUCIALUFIDUCIAL  [FIDUCIAL-MICRO]  163.07,59.44 0 top
FD82  FIDUCIALUFIDUCIAL  [FIDUCIAL-MICRO]  186.94,63.5 0 bottom
FD83  FIDUCIALUFIDUCIAL  [FIDUCIAL-MICRO]  163.32,83.31 0 bottom
FD84  FIDUCIALUFIDUCIAL  [FIDUCIAL-MICRO]  187.02,83.39 0 top
FD85  FIDUCIALUFIDUCIAL  [FIDUCIAL-MICRO]  7.62,85.34 0 top
FD86  FIDUCIALUFIDUCIAL  [FIDUCIAL-MICRO]  31.5,89.41 0 bottom
FD87  FIDUCIALUFIDUCIAL  [FIDUCIAL-MICRO]  7.87,109.22 0 bottom
FD88  FIDUCIALUFIDUCIAL  [FIDUCIAL-MICRO]  31.57,109.3 0 top
FD89  FIDUCIALUFIDUCIAL  [FIDUCIAL-MICRO]  33.53,85.34 0 top
FD90  FIDUCIALUFIDUCIAL  [FIDUCIAL-MICRO]  57.4,89.41 0 bottom
FD91  FIDUCIALUFIDUCIAL  [FIDUCIAL-MICRO]  33.78,109.22 0 bottom
FD92  FIDUCIALUFIDUCIAL  [FIDUCIAL-MICRO]  57.48,109.3 0 top
FD93  FIDUCIALUFIDUCIAL  [FIDUCIAL-MICRO]  59.44,85.34 0 top
FD94  FIDUCIALUFIDUCIAL  [FIDUCIAL-MICRO]  83.31,89.41 0 bottom
FD95  FIDUCIALUFIDUCIAL  [FIDUCIAL-MICRO]  59.69,109.22 0 bottom
FD96  FIDUCIALUFIDUCIAL  [FIDUCIAL-MICRO]  83.39,109.3 0 top
FD97  FIDUCIALUFIDUCIAL  [FIDUCIAL-MICRO]  85.34,85.34 0 top
FD98  FIDUCIALUFIDUCIAL  [FIDUCIAL-MICRO]  109.22,89.41 0 bottom
FD99  FIDUCIALUFIDUCIAL  [FIDUCIAL-MICRO]  85.6,109.22 0 bottom
FD100  FIDUCIALUFIDUCIAL  [FIDUCIAL-MICRO]  109.3,109.3 0 top
FD101  FIDUCIALUFIDUCIAL  [FIDUCIAL-MICRO]  111.25,85.34 0 top
FD102  FIDUCIALUFIDUCIAL  [FIDUCIAL-MICRO]  135.13,89.41 0 bottom
FD103  FIDUCIALUFIDUCIAL  [FIDUCIAL-MICRO]  111.51,109.22 0 bottom
FD104  FIDUCIALUFIDUCIAL  [FIDUCIAL-MICRO]  135.2,109.3 0 top
FD105  FIDUCIALUFIDUCIAL  [FIDUCIAL-MICRO]  137.16,85.34 0 top
FD106  FIDUCIALUFIDUCIAL  [FIDUCIAL-MICRO]  161.04,89.41 0 bottom
FD107  FIDUCIALUFIDUCIAL  [FIDUCIAL-MICRO]  137.41,109.22 0 bottom
FD108  FIDUCIALUFIDUCIAL  [FIDUCIAL-MICRO]  161.11,109.3 0 top
FD109  FIDUCIALUFIDUCIAL  [FIDUCIAL-MICRO]  163.07,85.34 0 top
FD110  FIDUCIALUFIDUCIAL  [FIDUCIAL-MICRO]  186.94,89.41 0 bottom
FD111  FIDUCIALUFIDUCIAL  [FIDUCIAL-MICRO]  163.32,109.22 0 bottom
FD112  FIDUCIALUFIDUCIAL  [FIDUCIAL-MICRO]  187.02,109.3 0 top
FD113  FIDUCIALUFIDUCIAL  [FIDUCIAL-MICRO]  7.62,111.25 0 top
FD114  FIDUCIALUFIDUCIAL  [FIDUCIAL-MICRO]  31.5,115.32 0 bottom
FD115  FIDUCIALUFIDUCIAL  [FIDUCIAL-MICRO]  7.87,135.13 0 bottom
FD116  FIDUCIALUFIDUCIAL  [FIDUCIAL-MICRO]  31.57,135.2 0 top
FD117  FIDUCIALUFIDUCIAL  [FIDUCIAL-MICRO]  33.53,111.25 0 top
FD118  FIDUCIALUFIDUCIAL  [FIDUCIAL-MICRO]  57.4,115.32 0 bottom
FD119  FIDUCIALUFIDUCIAL  [FIDUCIAL-MICRO]  33.78,135.13 0 bottom
FD120  FIDUCIALUFIDUCIAL  [FIDUCIAL-MICRO]  57.48,135.2 0 top
FD121  FIDUCIALUFIDUCIAL  [FIDUCIAL-MICRO]  59.44,111.25 0 top
FD122  FIDUCIALUFIDUCIAL  [FIDUCIAL-MICRO]  83.31,115.32 0 bottom
FD123  FIDUCIALUFIDUCIAL  [FIDUCIAL-MICRO]  59.69,135.13 0 bottom
FD124  FIDUCIALUFIDUCIAL  [FIDUCIAL-MICRO]  83.39,135.2 0 top
FD125  FIDUCIALUFIDUCIAL  [FIDUCIAL-MICRO]  85.34,111.25 0 top
FD126  FIDUCIALUFIDUCIAL  [FIDUCIAL-MICRO]  109.22,115.32 0 bottom
FD127  FIDUCIALUFIDUCIAL  [FIDUCIAL-MICRO]  85.6,135.13 0 bottom
FD128  FIDUCIALUFIDUCIAL  [FIDUCIAL-MICRO]  109.3,135.2 0 top
FD129  FIDUCIALUFIDUCIAL  [FIDUCIAL-MICRO]  111.25,111.25 0 top
FD130  FIDUCIALUFIDUCIAL  [FIDUCIAL-MICRO]  135.13,115.32 0 bottom
FD131  FIDUCIALUFIDUCIAL  [FIDUCIAL-MICRO]  111.51,135.13 0 bottom
FD132  FIDUCIALUFIDUCIAL  [FIDUCIAL-MICRO]  135.2,135.2 0 top
FD133  FIDUCIALUFIDUCIAL  [FIDUCIAL-MICRO]  137.16,111.25 0 top
FD134  FIDUCIALUFIDUCIAL  [FIDUCIAL-MICRO]  161.04,115.32 0 bottom
FD135  FIDUCIALUFIDUCIAL  [FIDUCIAL-MICRO]  137.41,135.13 0 bottom
FD136  FIDUCIALUFIDUCIAL  [FIDUCIAL-MICRO]  161.11,135.2 0 top
FD137  FIDUCIALUFIDUCIAL  [FIDUCIAL-MICRO]  163.07,111.25 0 top
FD138  FIDUCIALUFIDUCIAL  [FIDUCIAL-MICRO]  186.94,115.32 0 bottom
FD139  FIDUCIALUFIDUCIAL  [FIDUCIAL-MICRO]  163.32,135.13 0 bottom
FD140  FIDUCIALUFIDUCIAL  [FIDUCIAL-MICRO]  187.02,135.2 0 top
FD141  FIDUCIALUFIDUCIAL  [FIDUCIAL-MICRO]  7.62,137.16 0 top
FD142  FIDUCIALUFIDUCIAL  [FIDUCIAL-MICRO]  31.5,141.22 0 bottom
FD143  FIDUCIALUFIDUCIAL  [FIDUCIAL-MICRO]  7.87,161.04 0 bottom
FD144  FIDUCIALUFIDUCIAL  [FIDUCIAL-MICRO]  31.57,161.11 0 top
FD145  FIDUCIALUFIDUCIAL  [FIDUCIAL-MICRO]  33.53,137.16 0 top
FD146  FIDUCIALUFIDUCIAL  [FIDUCIAL-MICRO]  57.4,141.22 0 bottom
FD147  FIDUCIALUFIDUCIAL  [FIDUCIAL-MICRO]  33.78,161.04 0 bottom
FD148  FIDUCIALUFIDUCIAL  [FIDUCIAL-MICRO]  57.48,161.11 0 top
FD149  FIDUCIALUFIDUCIAL  [FIDUCIAL-MICRO]  59.44,137.16 0 top
FD150  FIDUCIALUFIDUCIAL  [FIDUCIAL-MICRO]  83.31,141.22 0 bottom
FD151  FIDUCIALUFIDUCIAL  [FIDUCIAL-MICRO]  59.69,161.04 0 bottom
FD152  FIDUCIALUFIDUCIAL  [FIDUCIAL-MICRO]  83.39,161.11 0 top
FD153  FIDUCIALUFIDUCIAL  [FIDUCIAL-MICRO]  85.34,137.16 0 top
FD154  FIDUCIALUFIDUCIAL  [FIDUCIAL-MICRO]  109.22,141.22 0 bottom
FD155  FIDUCIALUFIDUCIAL  [FIDUCIAL-MICRO]  85.6,161.04 0 bottom
FD156  FIDUCIALUFIDUCIAL  [FIDUCIAL-MICRO]  109.3,161.11 0 top
FD157  FIDUCIALUFIDUCIAL  [FIDUCIAL-MICRO]  111.25,137.16 0 top
FD158  FIDUCIALUFIDUCIAL  [FIDUCIAL-MICRO]  135.13,141.22 0 bottom
FD159  FIDUCIALUFIDUCIAL  [FIDUCIAL-MICRO]  111.51,161.04 0 bottom
FD160  FIDUCIALUFIDUCIAL  [FIDUCIAL-MICRO]  135.2,161.11 0 top
FD161  FIDUCIALUFIDUCIAL  [FIDUCIAL-MICRO]  137.16,137.16 0 top
FD162  FIDUCIALUFIDUCIAL  [FIDUCIAL-MICRO]  161.04,141.22 0 bottom
FD163  FIDUCIALUFIDUCIAL  [FIDUCIAL-MICRO]  137.41,161.04 0 bottom
FD164  FIDUCIALUFIDUCIAL  [FIDUCIAL-MICRO]  161.11,161.11 0 top
FD165  FIDUCIALUFIDUCIAL  [FIDUCIAL-MICRO]  163.07,137.16 0 top
FD166  FIDUCIALUFIDUCIAL  [FIDUCIAL-MICRO]  186.94,141.22 0 bottom
FD167  FIDUCIALUFIDUCIAL  [FIDUCIAL-MICRO]  163.32,161.04 0 bottom
FD168  FIDUCIALUFIDUCIAL  [FIDUCIAL-MICRO]  187.02,161.11 0 top
FD169  FIDUCIALUFIDUCIAL  [FIDUCIAL-MICRO]  7.62,163.07 0 top
FD170  FIDUCIALUFIDUCIAL  [FIDUCIAL-MICRO]  31.5,167.13 0 bottom
FD171  FIDUCIALUFIDUCIAL  [FIDUCIAL-MICRO]  7.87,186.94 0 bottom
FD172  FIDUCIALUFIDUCIAL  [FIDUCIAL-MICRO]  31.57,187.02 0 top
FD173  FIDUCIALUFIDUCIAL  [FIDUCIAL-MICRO]  33.53,163.07 0 top
FD174  FIDUCIALUFIDUCIAL  [FIDUCIAL-MICRO]  57.4,167.13 0 bottom
FD175  FIDUCIALUFIDUCIAL  [FIDUCIAL-MICRO]  33.78,186.94 0 bottom
FD176  FIDUCIALUFIDUCIAL  [FIDUCIAL-MICRO]  57.48,187.02 0 top
FD177  FIDUCIALUFIDUCIAL  [FIDUCIAL-MICRO]  59.44,163.07 0 top
FD178  FIDUCIALUFIDUCIAL  [FIDUCIAL-MICRO]  83.31,167.13 0 bottom
FD179  FIDUCIALUFIDUCIAL  [FIDUCIAL-MICRO]  59.69,186.94 0 bottom
FD180  FIDUCIALUFIDUCIAL  [FIDUCIAL-MICRO]  83.39,187.02 0 top
FD181  FIDUCIALUFIDUCIAL  [FIDUCIAL-MICRO]  85.34,163.07 0 top
FD182  FIDUCIALUFIDUCIAL  [FIDUCIAL-MICRO]  109.22,167.13 0 bottom
FD183  FIDUCIALUFIDUCIAL  [FIDUCIAL-MICRO]  85.6,186.94 0 bottom
FD184  FIDUCIALUFIDUCIAL  [FIDUCIAL-MICRO]  109.3,187.02 0 top
FD185  FIDUCIALUFIDUCIAL  [FIDUCIAL-MICRO]  111.25,163.07 0 top
FD186  FIDUCIALUFIDUCIAL  [FIDUCIAL-MICRO]  135.13,167.13 0 bottom
FD187  FIDUCIALUFIDUCIAL  [FIDUCIAL-MICRO]  111.51,186.94 0 bottom
FD188  FIDUCIALUFIDUCIAL  [FIDUCIAL-MICRO]  135.2,187.02 0 top
FD189  FIDUCIALUFIDUCIAL  [FIDUCIAL-MICRO]  137.16,163.07 0 top
FD190  FIDUCIALUFIDUCIAL  [FIDUCIAL-MICRO]  161.04,167.13 0 bottom
FD191  FIDUCIALUFIDUCIAL  [FIDUCIAL-MICRO]  137.41,186.94 0 bottom
FD192  FIDUCIALUFIDUCIAL  [FIDUCIAL-MICRO]  161.11,187.02 0 top
FD193  FIDUCIALUFIDUCIAL  [FIDUCIAL-MICRO]  163.07,163.07 0 top
FD194  FIDUCIALUFIDUCIAL  [FIDUCIAL-MICRO]  186.94,167.13 0 bottom
FD195  FIDUCIALUFIDUCIAL  [FIDUCIAL-MICRO]  163.32,186.94 0 bottom
FD196  FIDUCIALUFIDUCIAL  [FIDUCIAL-MICRO]  187.02,187.02 0 top
H1  STAND-OFF  [STAND-OFF]  29.72,29.72 0 top
H2  STAND-OFF  [STAND-OFF]  29.72,9.4 0 top
H3  STAND-OFF  [STAND-OFF]  9.4,9.4 0 top
H4  STAND-OFF  [STAND-OFF]  55.63,29.72 0 top
H5  STAND-OFF  [STAND-OFF]  55.63,9.4 0 top
H6  STAND-OFF  [STAND-OFF]  35.31,9.4 0 top
H7  STAND-OFF  [STAND-OFF]  81.53,29.72 0 top
H8  STAND-OFF  [STAND-OFF]  81.53,9.4 0 top
H9  STAND-OFF  [STAND-OFF]  61.21,9.4 0 top
H10  STAND-OFF  [STAND-OFF]  107.44,29.72 0 top
H11  STAND-OFF  [STAND-OFF]  107.44,9.4 0 top
H12  STAND-OFF  [STAND-OFF]  87.12,9.4 0 top
H13  STAND-OFF  [STAND-OFF]  133.35,29.72 0 top
H14  STAND-OFF  [STAND-OFF]  133.35,9.4 0 top
H15  STAND-OFF  [STAND-OFF]  113.03,9.4 0 top
H16  STAND-OFF  [STAND-OFF]  159.26,29.72 0 top
H17  STAND-OFF  [STAND-OFF]  159.26,9.4 0 top
H18  STAND-OFF  [STAND-OFF]  138.94,9.4 0 top
H19  STAND-OFF  [STAND-OFF]  185.17,29.72 0 top
H20  STAND-OFF  [STAND-OFF]  185.17,9.4 0 top
H21  STAND-OFF  [STAND-OFF]  164.85,9.4 0 top
H22  STAND-OFF  [STAND-OFF]  29.72,55.63 0 top
H23  STAND-OFF  [STAND-OFF]  29.72,35.31 0 top
H24  STAND-OFF  [STAND-OFF]  9.4,35.31 0 top
H25  STAND-OFF  [STAND-OFF]  55.63,55.63 0 top
H26  STAND-OFF  [STAND-OFF]  55.63,35.31 0 top
H27  STAND-OFF  [STAND-OFF]  35.31,35.31 0 top
H28  STAND-OFF  [STAND-OFF]  81.53,55.63 0 top
H29  STAND-OFF  [STAND-OFF]  81.53,35.31 0 top
H30  STAND-OFF  [STAND-OFF]  61.21,35.31 0 top
H31  STAND-OFF  [STAND-OFF]  107.44,55.63 0 top
H32  STAND-OFF  [STAND-OFF]  107.44,35.31 0 top
H33  STAND-OFF  [STAND-OFF]  87.12,35.31 0 top
H34  STAND-OFF  [STAND-OFF]  133.35,55.63 0 top
H35  STAND-OFF  [STAND-OFF]  133.35,35.31 0 top
H36  STAND-OFF  [STAND-OFF]  113.03,35.31 0 top
H37  STAND-OFF  [STAND-OFF]  159.26,55.63 0 top
H38  STAND-OFF  [STAND-OFF]  159.26,35.31 0 top
H39  STAND-OFF  [STAND-OFF]  138.94,35.31 0 top
H40  STAND-OFF  [STAND-OFF]  185.17,55.63 0 top
H41  STAND-OFF  [STAND-OFF]  185.17,35.31 0 top
H42  STAND-OFF  [STAND-OFF]  164.85,35.31 0 top
H43  STAND-OFF  [STAND-OFF]  29.72,81.53 0 top
H44  STAND-OFF  [STAND-OFF]  29.72,61.21 0 top
H45  STAND-OFF  [STAND-OFF]  9.4,61.21 0 top
H46  STAND-OFF  [STAND-OFF]  55.63,81.53 0 top
H47  STAND-OFF  [STAND-OFF]  55.63,61.21 0 top
H48  STAND-OFF  [STAND-OFF]  35.31,61.21 0 top
H49  STAND-OFF  [STAND-OFF]  81.53,81.53 0 top
H50  STAND-OFF  [STAND-OFF]  81.53,61.21 0 top
H51  STAND-OFF  [STAND-OFF]  61.21,61.21 0 top
H52  STAND-OFF  [STAND-OFF]  107.44,81.53 0 top
H53  STAND-OFF  [STAND-OFF]  107.44,61.21 0 top
H54  STAND-OFF  [STAND-OFF]  87.12,61.21 0 top
H55  STAND-OFF  [STAND-OFF]  133.35,81.53 0 top
H56  STAND-OFF  [STAND-OFF]  133.35,61.21 0 top
H57  STAND-OFF  [STAND-OFF]  113.03,61.21 0 top
H58  STAND-OFF  [STAND-OFF]  159.26,81.53 0 top
H59  STAND-OFF  [STAND-OFF]  159.26,61.21 0 top
H60  STAND-OFF  [STAND-OFF]  138.94,61.21 0 top
H61  STAND-OFF  [STAND-OFF]  185.17,81.53 0 top
H62  STAND-OFF  [STAND-OFF]  185.17,61.21 0 top
H63  STAND-OFF  [STAND-OFF]  164.85,61.21 0 top
H64  STAND-OFF  [STAND-OFF]  29.72,107.44 0 top
H65  STAND-OFF  [STAND-OFF]  29.72,87.12 0 top
H66  STAND-OFF  [STAND-OFF]  9.4,87.12 0 top
H67  STAND-OFF  [STAND-OFF]  55.63,107.44 0 top
H68  STAND-OFF  [STAND-OFF]  55.63,87.12 0 top
H69  STAND-OFF  [STAND-OFF]  35.31,87.12 0 top
H70  STAND-OFF  [STAND-OFF]  81.53,107.44 0 top
H71  STAND-OFF  [STAND-OFF]  81.53,87.12 0 top
H72  STAND-OFF  [STAND-OFF]  61.21,87.12 0 top
H73  STAND-OFF  [STAND-OFF]  107.44,107.44 0 top
H74  STAND-OFF  [STAND-OFF]  107.44,87.12 0 top
H75  STAND-OFF  [STAND-OFF]  87.12,87.12 0 top
H76  STAND-OFF  [STAND-OFF]  133.35,107.44 0 top
H77  STAND-OFF  [STAND-OFF]  133.35,87.12 0 top
H78  STAND-OFF  [STAND-OFF]  113.03,87.12 0 top
H79  STAND-OFF  [STAND-OFF]  159.26,107.44 0 top
H80  STAND-OFF  [STAND-OFF]  159.26,87.12 0 top
H81  STAND-OFF  [STAND-OFF]  138.94,87.12 0 top
H82  STAND-OFF  [STAND-OFF]  185.17,107.44 0 top
H83  STAND-OFF  [STAND-OFF]  185.17,87.12 0 top
H84  STAND-OFF  [STAND-OFF]  164.85,87.12 0 top
H85  STAND-OFF  [STAND-OFF]  29.72,133.35 0 top
H86  STAND-OFF  [STAND-OFF]  29.72,113.03 0 top
H87  STAND-OFF  [STAND-OFF]  9.4,113.03 0 top
H88  STAND-OFF  [STAND-OFF]  55.63,133.35 0 top
H89  STAND-OFF  [STAND-OFF]  55.63,113.03 0 top
H90  STAND-OFF  [STAND-OFF]  35.31,113.03 0 top
H91  STAND-OFF  [STAND-OFF]  81.53,133.35 0 top
H92  STAND-OFF  [STAND-OFF]  81.53,113.03 0 top
H93  STAND-OFF  [STAND-OFF]  61.21,113.03 0 top
H94  STAND-OFF  [STAND-OFF]  107.44,133.35 0 top
H95  STAND-OFF  [STAND-OFF]  107.44,113.03 0 top
H96  STAND-OFF  [STAND-OFF]  87.12,113.03 0 top
H97  STAND-OFF  [STAND-OFF]  133.35,133.35 0 top
H98  STAND-OFF  [STAND-OFF]  133.35,113.03 0 top
H99  STAND-OFF  [STAND-OFF]  113.03,113.03 0 top
H100  STAND-OFF  [STAND-OFF]  159.26,133.35 0 top
H101  STAND-OFF  [STAND-OFF]  159.26,113.03 0 top
H102  STAND-OFF  [STAND-OFF]  138.94,113.03 0 top
H103  STAND-OFF  [STAND-OFF]  185.17,133.35 0 top
H104  STAND-OFF  [STAND-OFF]  185.17,113.03 0 top
H105  STAND-OFF  [STAND-OFF]  164.85,113.03 0 top
H106  STAND-OFF  [STAND-OFF]  29.72,159.26 0 top
H107  STAND-OFF  [STAND-OFF]  29.72,138.94 0 top
H108  STAND-OFF  [STAND-OFF]  9.4,138.94 0 top
H109  STAND-OFF  [STAND-OFF]  55.63,159.26 0 top
H110  STAND-OFF  [STAND-OFF]  55.63,138.94 0 top
H111  STAND-OFF  [STAND-OFF]  35.31,138.94 0 top
H112  STAND-OFF  [STAND-OFF]  81.53,159.26 0 top
H113  STAND-OFF  [STAND-OFF]  81.53,138.94 0 top
H114  STAND-OFF  [STAND-OFF]  61.21,138.94 0 top
H115  STAND-OFF  [STAND-OFF]  107.44,159.26 0 top
H116  STAND-OFF  [STAND-OFF]  107.44,138.94 0 top
H117  STAND-OFF  [STAND-OFF]  87.12,138.94 0 top
H118  STAND-OFF  [STAND-OFF]  133.35,159.26 0 top
H119  STAND-OFF  [STAND-OFF]  133.35,138.94 0 top
H120  STAND-OFF  [STAND-OFF]  113.03,138.94 0 top
H121  STAND-OFF  [STAND-OFF]  159.26,159.26 0 top
H122  STAND-OFF  [STAND-OFF]  159.26,138.94 0 top
H123  STAND-OFF  [STAND-OFF]  138.94,138.94 0 top
H124  STAND-OFF  [STAND-OFF]  185.17,159.26 0 top
H125  STAND-OFF  [STAND-OFF]  185.17,138.94 0 top
H126  STAND-OFF  [STAND-OFF]  164.85,138.94 0 top
H127  STAND-OFF  [STAND-OFF]  29.72,185.17 0 top
H128  STAND-OFF  [STAND-OFF]  29.72,164.85 0 top
H129  STAND-OFF  [STAND-OFF]  9.4,164.85 0 top
H130  STAND-OFF  [STAND-OFF]  55.63,185.17 0 top
H131  STAND-OFF  [STAND-OFF]  55.63,164.85 0 top
H132  STAND-OFF  [STAND-OFF]  35.31,164.85 0 top
H133  STAND-OFF  [STAND-OFF]  81.53,185.17 0 top
H134  STAND-OFF  [STAND-OFF]  81.53,164.85 0 top
H135  STAND-OFF  [STAND-OFF]  61.21,164.85 0 top
H136  STAND-OFF  [STAND-OFF]  107.44,185.17 0 top
H137  STAND-OFF  [STAND-OFF]  107.44,164.85 0 top
H138  STAND-OFF  [STAND-OFF]  87.12,164.85 0 top
H139  STAND-OFF  [STAND-OFF]  133.35,185.17 0 top
H140  STAND-OFF  [STAND-OFF]  133.35,164.85 0 top
H141  STAND-OFF  [STAND-OFF]  113.03,164.85 0 top
H142  STAND-OFF  [STAND-OFF]  159.26,185.17 0 top
H143  STAND-OFF  [STAND-OFF]  159.26,164.85 0 top
H144  STAND-OFF  [STAND-OFF]  138.94,164.85 0 top
H145  STAND-OFF  [STAND-OFF]  185.17,185.17 0 top
H146  STAND-OFF  [STAND-OFF]  185.17,164.85 0 top
H147  STAND-OFF  [STAND-OFF]  164.85,164.85 0 top
J1  [JST04_1MM_RA]  19.56,11.94 0 top
J2  [JST-2-SMD]  16.26,27.81 0 bottom
J3  [USB-MICROB-PTH-MILL]  13.84,27.3 180 top
J4  [1X06_NO_SILK]  8.13,13.21 90 top
J5  [1X02_NO_SILK]  30.99,23.37 90 top
J6  [1X04_1.27MM]  26.16,18.03 180 top
J7  [JST04_1MM_RA]  45.47,11.94 0 top
J8  [1X04_NO_SILK]  30.99,13.46 90 top
J9  [JST-2-SMD]  42.16,27.81 0 bottom
J10  [USB-MICROB-PTH-MILL]  39.75,27.3 180 top
J11  [1X06_NO_SILK]  34.04,13.21 90 top
J12  [1X02_NO_SILK]  56.9,23.37 90 top
J13  [1X04_NO_SILK]  56.9,13.46 90 top
J14  [1X04_1.27MM]  52.07,18.03 180 top
J15  [JST04_1MM_RA]  71.37,11.94 0 top
J16  [JST-2-SMD]  68.07,27.81 0 bottom
J17  [USB-MICROB-PTH-MILL]  65.66,27.3 180 top
J18  [1X06_NO_SILK]  59.94,13.21 90 top
J19  [1X02_NO_SILK]  82.8,23.37 90 top
J20  [1X04_NO_SILK]  82.8,13.46 90 top
J21  [1X04_1.27MM]  77.98,18.03 180 top
J22  [JST04_1MM_RA]  97.28,11.94 0 top
J23  [JST-2-SMD]  93.98,27.81 0 bottom
J24  [USB-MICROB-PTH-MILL]  91.57,27.3 180 top
J25  [1X06_NO_SILK]  85.85,13.21 90 top
J26  [1X02_NO_SILK]  108.71,23.37 90 top
J27  [1X04_NO_SILK]  108.71,13.46 90 top
J28  [1X04_1.27MM]  103.89,18.03 180 top
J29  [JST04_1MM_RA]  123.19,11.94 0 top
J30  [JST-2-SMD]  119.89,27.81 0 bottom
J31  [USB-MICROB-PTH-MILL]  117.48,27.3 180 top
J32  [1X06_NO_SILK]  111.76,13.21 90 top
J33  [1X02_NO_SILK]  134.62,23.37 90 top
J34  [1X04_NO_SILK]  134.62,13.46 90 top
J35  [1X04_1.27MM]  129.79,18.03 180 top
J36  [JST04_1MM_RA]  149.1,11.94 0 top
J37  [JST-2-SMD]  145.8,27.81 0 bottom
J38  [USB-MICROB-PTH-MILL]  143.38,27.3 180 top
J39  [1X06_NO_SILK]  137.67,13.21 90 top
J40  [1X02_NO_SILK]  160.53,23.37 90 top
J41  [1X04_NO_SILK]  160.53,13.46 90 top
J42  [1X04_1.27MM]  155.7,18.03 180 top
J43  [JST04_1MM_RA]  175.01,11.94 0 top
J44  [JST-2-SMD]  171.7,27.81 0 bottom
J45  [USB-MICROB-PTH-MILL]  169.29,27.3 180 top
J46  [1X06_NO_SILK]  163.58,13.21 90 top
J47  [1X02_NO_SILK]  186.44,23.37 90 top
J48  [1X04_NO_SILK]  186.44,13.46 90 top
J49  [1X04_1.27MM]  181.61,18.03 180 top
J50  [JST04_1MM_RA]  19.56,37.85 0 top
J51  [JST-2-SMD]  16.26,53.72 0 bottom
J52  [USB-MICROB-PTH-MILL]  13.84,53.21 180 top
J53  [1X06_NO_SILK]  8.13,39.12 90 top
J54  [1X02_NO_SILK]  30.99,49.28 90 top
J55  [1X04_NO_SILK]  30.99,39.37 90 top
J56  [1X04_1.27MM]  26.16,43.94 180 top
J57  [JST04_1MM_RA]  45.47,37.85 0 top
J58  [JST-2-SMD]  42.16,53.72 0 bottom
J59  [USB-MICROB-PTH-MILL]  39.75,53.21 180 top
J60  [1X06_NO_SILK]  34.04,39.12 90 top
J61  [1X02_NO_SILK]  56.9,49.28 90 top
J62  [1X04_NO_SILK]  56.9,39.37 90 top
J63  [1X04_1.27MM]  52.07,43.94 180 top
J64  [JST04_1MM_RA]  71.37,37.85 0 top
J65  [JST-2-SMD]  68.07,53.72 0 bottom
J66  [USB-MICROB-PTH-MILL]  65.66,53.21 180 top
J67  [1X06_NO_SILK]  59.94,39.12 90 top
J68  [1X02_NO_SILK]  82.8,49.28 90 top
J69  [1X04_NO_SILK]  82.8,39.37 90 top
J70  [1X04_1.27MM]  77.98,43.94 180 top
J71  [JST04_1MM_RA]  97.28,37.85 0 top
J72  [JST-2-SMD]  93.98,53.72 0 bottom
J73  [USB-MICROB-PTH-MILL]  91.57,53.21 180 top
J74  [1X06_NO_SILK]  85.85,39.12 90 top
J75  [1X02_NO_SILK]  108.71,49.28 90 top
J76  [1X04_NO_SILK]  108.71,39.37 90 top
J77  [1X04_1.27MM]  103.89,43.94 180 top
J78  [JST04_1MM_RA]  123.19,37.85 0 top
J79  [JST-2-SMD]  119.89,53.72 0 bottom
J80  [USB-MICROB-PTH-MILL]  117.48,53.21 180 top
J81  [1X06_NO_SILK]  111.76,39.12 90 top
J82  [1X02_NO_SILK]  134.62,49.28 90 top
J83  [1X04_NO_SILK]  134.62,39.37 90 top
J84  [1X04_1.27MM]  129.79,43.94 180 top
J85  [JST04_1MM_RA]  149.1,37.85 0 top
J86  [JST-2-SMD]  145.8,53.72 0 bottom
J87  [USB-MICROB-PTH-MILL]  143.38,53.21 180 top
J88  [1X06_NO_SILK]  137.67,39.12 90 top
J89  [1X02_NO_SILK]  160.53,49.28 90 top
J90  [1X04_NO_SILK]  160.53,39.37 90 top
J91  [1X04_1.27MM]  155.7,43.94 180 top
J92  [JST04_1MM_RA]  175.01,37.85 0 top
J93  [JST-2-SMD]  171.7,53.72 0 bottom
J94  [USB-MICROB-PTH-MILL]  169.29,53.21 180 top
J95  [1X06_NO_SILK]  163.58,39.12 90 top
J96  [1X02_NO_SILK]  186.44,49.28 90 top
J97  [1X04_NO_SILK]  186.44,39.37 90 top
J98  [1X04_1.27MM]  181.61,43.94 180 top
J99  [JST04_1MM_RA]  19.56,63.75 0 top
J100  [JST-2-SMD]  16.26,79.63 0 bottom
J101  [USB-MICROB-PTH-MILL]  13.84,79.12 180 top
J102  [1X06_NO_SILK]  8.13,65.02 90 top
J103  [1X02_NO_SILK]  30.99,75.18 90 top
J104  [1X04_NO_SILK]  30.99,65.28 90 top
J105  [1X04_1.27MM]  26.16,69.85 180 top
J106  [JST04_1MM_RA]  45.47,63.75 0 top
J107  [JST-2-SMD]  42.16,79.63 0 bottom
J108  [USB-MICROB-PTH-MILL]  39.75,79.12 180 top
J109  [1X06_NO_SILK]  34.04,65.02 90 top
J110  [1X02_NO_SILK]  56.9,75.18 90 top
J111  [1X04_NO_SILK]  56.9,65.28 90 top
J112  [1X04_1.27MM]  52.07,69.85 180 top
J113  [JST04_1MM_RA]  71.37,63.75 0 top
J114  [JST-2-SMD]  68.07,79.63 0 bottom
J115  [USB-MICROB-PTH-MILL]  65.66,79.12 180 top
J116  [1X06_NO_SILK]  59.94,65.02 90 top
J117  [1X02_NO_SILK]  82.8,75.18 90 top
J118  [1X04_NO_SILK]  82.8,65.28 90 top
J119  [1X04_1.27MM]  77.98,69.85 180 top
J120  [JST04_1MM_RA]  97.28,63.75 0 top
J121  [JST-2-SMD]  93.98,79.63 0 bottom
J122  [USB-MICROB-PTH-MILL]  91.57,79.12 180 top
J123  [1X06_NO_SILK]  85.85,65.02 90 top
J124  [1X02_NO_SILK]  108.71,75.18 90 top
J125  [1X04_NO_SILK]  108.71,65.28 90 top
J126  [1X04_1.27MM]  103.89,69.85 180 top
J127  [JST04_1MM_RA]  123.19,63.75 0 top
J128  [JST-2-SMD]  119.89,79.63 0 bottom
J129  [USB-MICROB-PTH-MILL]  117.48,79.12 180 top
J130  [1X06_NO_SILK]  111.76,65.02 90 top
J131  [1X02_NO_SILK]  134.62,75.18 90 top
J132  [1X04_NO_SILK]  134.62,65.28 90 top
J133  [1X04_1.27MM]  129.79,69.85 180 top
J134  [JST04_1MM_RA]  149.1,63.75 0 top
J135  [JST-2-SMD]  145.8,79.63 0 bottom
J136  [USB-MICROB-PTH-MILL]  143.38,79.12 180 top
J137  [1X06_NO_SILK]  137.67,65.02 90 top
J138  [1X02_NO_SILK]  160.53,75.18 90 top
J139  [1X04_NO_SILK]  160.53,65.28 90 top
J140  [1X04_1.27MM]  155.7,69.85 180 top
J141  [JST04_1MM_RA]  175.01,63.75 0 top
J142  [JST-2-SMD]  171.7,79.63 0 bottom
J143  [USB-MICROB-PTH-MILL]  169.29,79.12 180 top
J144  [1X06_NO_SILK]  163.58,65.02 90 top
J145  [1X02_NO_SILK]  186.44,75.18 90 top
J146  [1X04_NO_SILK]  186.44,65.28 90 top
J147  [1X04_1.27MM]  181.61,69.85 180 top
J148  [JST04_1MM_RA]  19.56,89.66 0 top
J149  [JST-2-SMD]  16.26,105.54 0 bottom
J150  [USB-MICROB-PTH-MILL]  13.84,105.03 180 top
J151  [1X06_NO_SILK]  8.13,90.93 90 top
J152  [1X02_NO_SILK]  30.99,101.09 90 top
J153  [1X04_NO_SILK]  30.99,91.19 90 top
J154  [1X04_1.27MM]  26.16,95.76 180 top
J155  [JST04_1MM_RA]  45.47,89.66 0 top
J156  [JST-2-SMD]  42.16,105.54 0 bottom
J157  [USB-MICROB-PTH-MILL]  39.75,105.03 180 top
J158  [1X06_NO_SILK]  34.04,90.93 90 top
J159  [1X02_NO_SILK]  56.9,101.09 90 top
J160  [1X04_NO_SILK]  56.9,91.19 90 top
J161  [1X04_1.27MM]  52.07,95.76 180 top
J162  [JST04_1MM_RA]  71.37,89.66 0 top
J163  [JST-2-SMD]  68.07,105.54 0 bottom
J164  [USB-MICROB-PTH-MILL]  65.66,105.03 180 top
J165  [1X06_NO_SILK]  59.94,90.93 90 top
J166  [1X02_NO_SILK]  82.8,101.09 90 top
J167  [1X04_NO_SILK]  82.8,91.19 90 top
J168  [1X04_1.27MM]  77.98,95.76 180 top
J169  [JST04_1MM_RA]  97.28,89.66 0 top
J170  [JST-2-SMD]  93.98,105.54 0 bottom
J171  [USB-MICROB-PTH-MILL]  91.57,105.03 180 top
J172  [1X06_NO_SILK]  85.85,90.93 90 top
J173  [1X02_NO_SILK]  108.71,101.09 90 top
J174  [1X04_NO_SILK]  108.71,91.19 90 top
J175  [1X04_1.27MM]  103.89,95.76 180 top
J176  [JST04_1MM_RA]  123.19,89.66 0 top
J177  [JST-2-SMD]  119.89,105.54 0 bottom
J178  [USB-MICROB-PTH-MILL]  117.48,105.03 180 top
J179  [1X06_NO_SILK]  111.76,90.93 90 top
J180  [1X02_NO_SILK]  134.62,101.09 90 top
J181  [1X04_NO_SILK]  134.62,91.19 90 top
J182  [1X04_1.27MM]  129.79,95.76 180 top
J183  [JST04_1MM_RA]  149.1,89.66 0 top
J184  [JST-2-SMD]  145.8,105.54 0 bottom
J185  [USB-MICROB-PTH-MILL]  143.38,105.03 180 top
J186  [1X06_NO_SILK]  137.67,90.93 90 top
J187  [1X02_NO_SILK]  160.53,101.09 90 top
J188  [1X04_NO_SILK]  160.53,91.19 90 top
J189  [1X04_1.27MM]  155.7,95.76 180 top
J190  [JST04_1MM_RA]  175.01,89.66 0 top
J191  [JST-2-SMD]  171.7,105.54 0 bottom
J192  [USB-MICROB-PTH-MILL]  169.29,105.03 180 top
J193  [1X06_NO_SILK]  163.58,90.93 90 top
J194  [1X02_NO_SILK]  186.44,101.09 90 top
J195  [1X04_NO_SILK]  186.44,91.19 90 top
J196  [1X04_1.27MM]  181.61,95.76 180 top
J197  [JST04_1MM_RA]  19.56,115.57 0 top
J198  [JST-2-SMD]  16.26,131.44 0 bottom
J199  [USB-MICROB-PTH-MILL]  13.84,130.94 180 top
J200  [1X06_NO_SILK]  8.13,116.84 90 top
J201  [1X02_NO_SILK]  30.99,127 90 top
J202  [1X04_NO_SILK]  30.99,117.09 90 top
J203  [1X04_1.27MM]  26.16,121.67 180 top
J204  [JST04_1MM_RA]  45.47,115.57 0 top
J205  [JST-2-SMD]  42.16,131.44 0 bottom
J206  [USB-MICROB-PTH-MILL]  39.75,130.94 180 top
J207  [1X06_NO_SILK]  34.04,116.84 90 top
J208  [1X02_NO_SILK]  56.9,127 90 top
J209  [1X04_NO_SILK]  56.9,117.09 90 top
J210  [1X04_1.27MM]  52.07,121.67 180 top
J211  [JST04_1MM_RA]  71.37,115.57 0 top
J212  [JST-2-SMD]  68.07,131.44 0 bottom
J213  [USB-MICROB-PTH-MILL]  65.66,130.94 180 top
J214  [1X06_NO_SILK]  59.94,116.84 90 top
J215  [1X02_NO_SILK]  82.8,127 90 top
J216  [1X04_NO_SILK]  82.8,117.09 90 top
J217  [1X04_1.27MM]  77.98,121.67 180 top
J218  [JST04_1MM_RA]  97.28,115.57 0 top
J219  [JST-2-SMD]  93.98,131.44 0 bottom
J220  [USB-MICROB-PTH-MILL]  91.57,130.94 180 top
J221  [1X06_NO_SILK]  85.85,116.84 90 top
J222  [1X02_NO_SILK]  108.71,127 90 top
J223  [1X04_NO_SILK]  108.71,117.09 90 top
J224  [1X04_1.27MM]  103.89,121.67 180 top
J225  [JST04_1MM_RA]  123.19,115.57 0 top
J226  [JST-2-SMD]  119.89,131.44 0 bottom
J227  [USB-MICROB-PTH-MILL]  117.48,130.94 180 top
J228  [1X06_NO_SILK]  111.76,116.84 90 top
J229  [1X02_NO_SILK]  134.62,127 90 top
J230  [1X04_NO_SILK]  134.62,117.09 90 top
J231  [1X04_1.27MM]  129.79,121.67 180 top
J232  [JST04_1MM_RA]  149.1,115.57 0 top
J233  [JST-2-SMD]  145.8,131.44 0 bottom
J234  [USB-MICROB-PTH-MILL]  143.38,130.94 180 top
J235  [1X06_NO_SILK]  137.67,116.84 90 top
J236  [1X02_NO_SILK]  160.53,127 90 top
J237  [1X04_NO_SILK]  160.53,117.09 90 top
J238  [1X04_1.27MM]  155.7,121.67 180 top
J239  [JST04_1MM_RA]  175.01,115.57 0 top
J240  [JST-2-SMD]  171.7,131.44 0 bottom
J241  [USB-MICROB-PTH-MILL]  169.29,130.94 180 top
J242  [1X06_NO_SILK]  163.58,116.84 90 top
J243  [1X02_NO_SILK]  186.44,127 90 top
J244  [1X04_NO_SILK]  186.44,117.09 90 top
J245  [1X04_1.27MM]  181.61,121.67 180 top
J246  [JST04_1MM_RA]  19.56,141.48 0 top
J247  [JST-2-SMD]  16.26,157.35 0 bottom
J248  [USB-MICROB-PTH-MILL]  13.84,156.84 180 top
J249  [1X06_NO_SILK]  8.13,142.75 90 top
J250  [1X02_NO_SILK]  30.99,152.91 90 top
J251  [1X04_NO_SILK]  30.99,143 90 top
J252  [1X04_1.27MM]  26.16,147.57 180 top
J253  [JST04_1MM_RA]  45.47,141.48 0 top
J254  [JST-2-SMD]  42.16,157.35 0 bottom
J255  [USB-MICROB-PTH-MILL]  39.75,156.84 180 top
J256  [1X06_NO_SILK]  34.04,142.75 90 top
J257  [1X02_NO_SILK]  56.9,152.91 90 top
J258  [1X04_NO_SILK]  56.9,143 90 top
J259  [1X04_1.27MM]  52.07,147.57 180 top
J260  [JST04_1MM_RA]  71.37,141.48 0 top
J261  [JST-2-SMD]  68.07,157.35 0 bottom
J262  [USB-MICROB-PTH-MILL]  65.66,156.84 180 top
J263  [1X06_NO_SILK]  59.94,142.75 90 top
J264  [1X02_NO_SILK]  82.8,152.91 90 top
J265  [1X04_NO_SILK]  82.8,143 90 top
J266  [1X04_1.27MM]  77.98,147.57 180 top
J267  [JST04_1MM_RA]  97.28,141.48 0 top
J268  [JST-2-SMD]  93.98,157.35 0 bottom
J269  [USB-MICROB-PTH-MILL]  91.57,156.84 180 top
J270  [1X06_NO_SILK]  85.85,142.75 90 top
J271  [1X02_NO_SILK]  108.71,152.91 90 top
J272  [1X04_NO_SILK]  108.71,143 90 top
J273  [1X04_1.27MM]  103.89,147.57 180 top
J274  [JST04_1MM_RA]  123.19,141.48 0 top
J275  [JST-2-SMD]  119.89,157.35 0 bottom
J276  [USB-MICROB-PTH-MILL]  117.48,156.84 180 top
J277  [1X06_NO_SILK]  111.76,142.75 90 top